# Altium PCB PCB1.PcbDoc (part 1 of 2)
Units mm, origin at the board's own origin, x right, y up, seen from the top; angles counter-clockwise.
Board outline 54.2 x 60.2 mm, 4 copper layers (Top Layer, Layer 1, Layer 2, Bottom Layer), stack 1.57 mm thick; 81 components, 54 nets, 273 pads, 297 vias.
Unrouted connection lines stored in the file: 3.
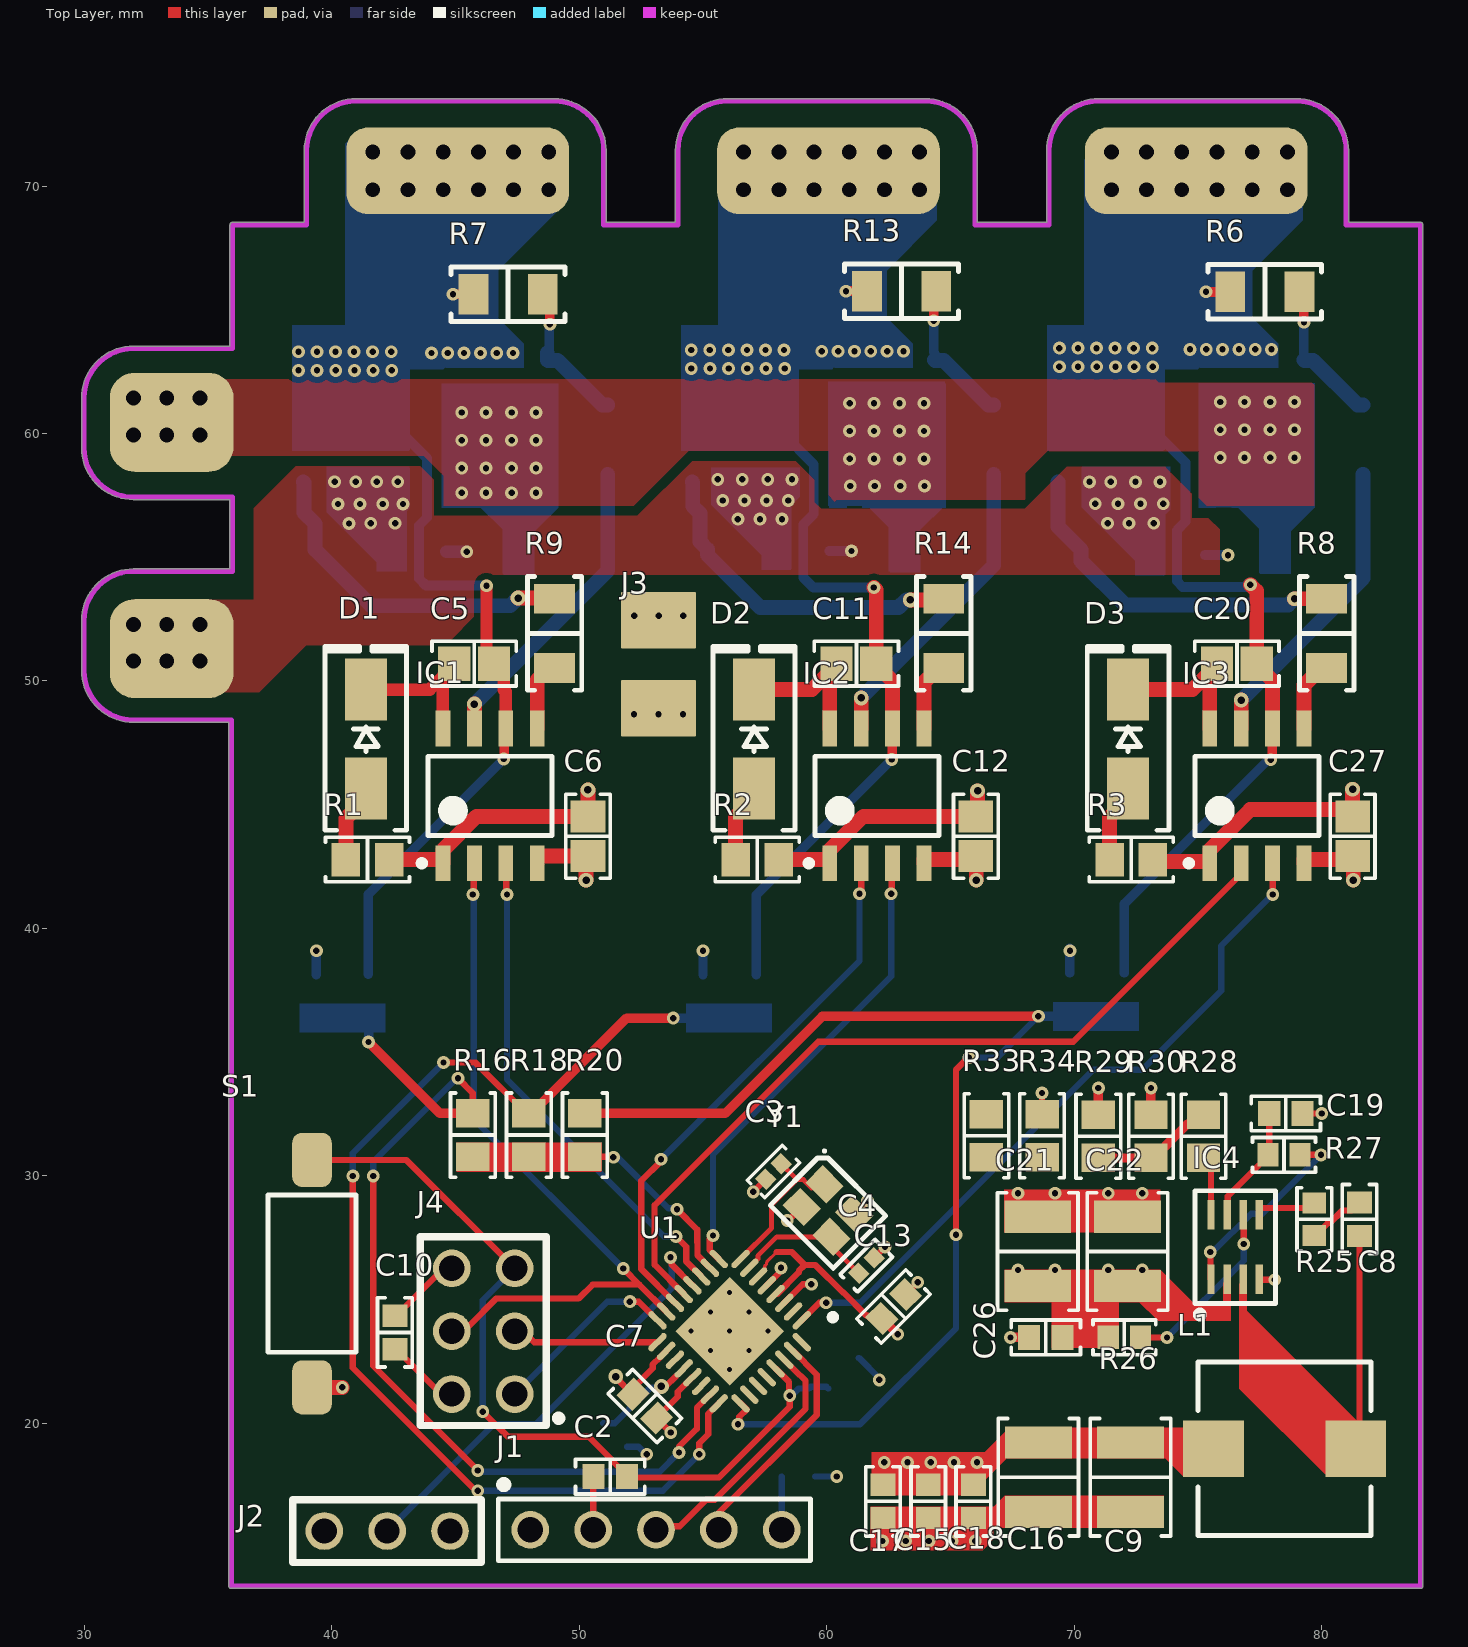
[diagram p0: Top Layer view]
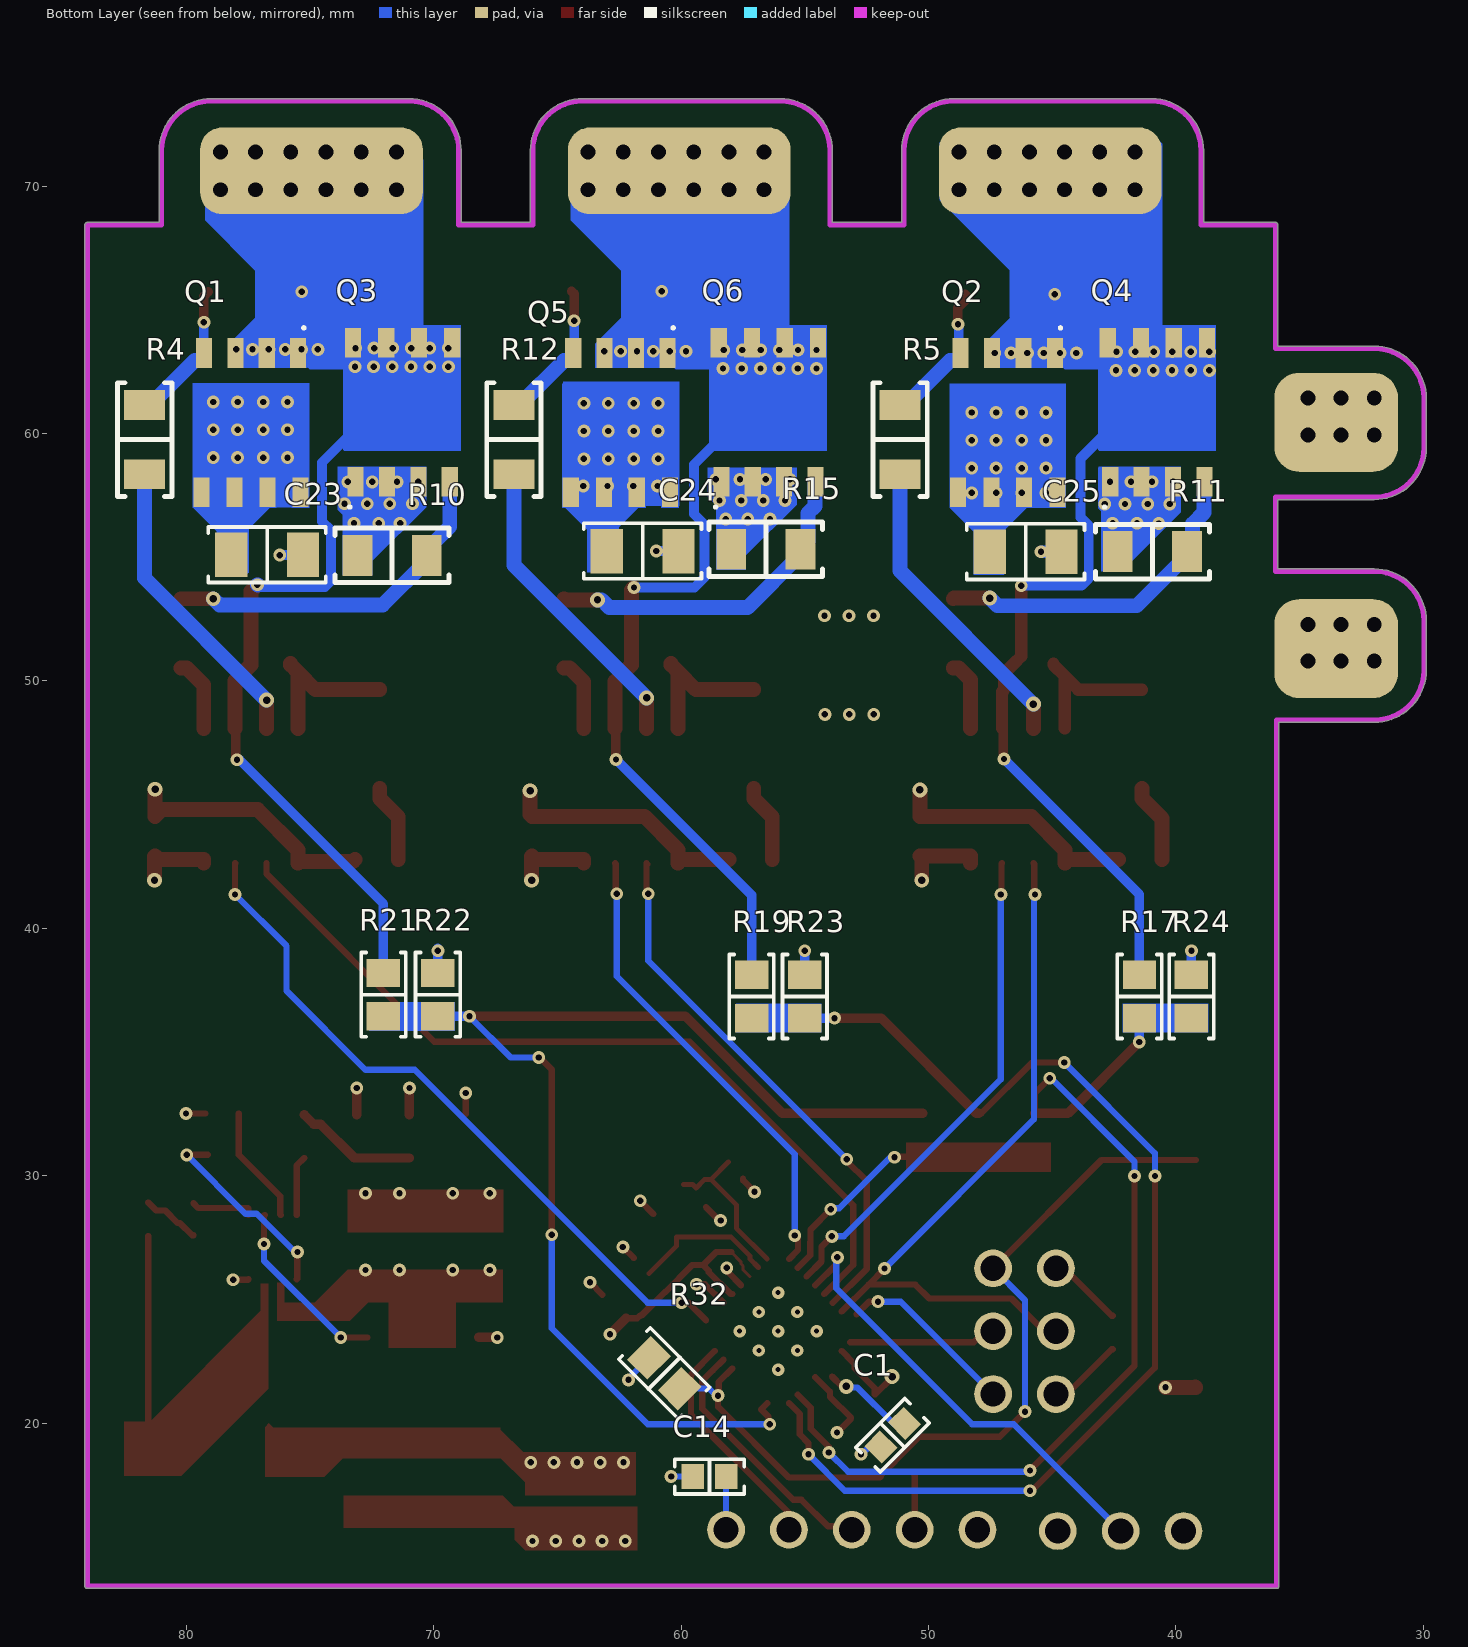
[diagram p1: Bottom Layer view, seen from below]
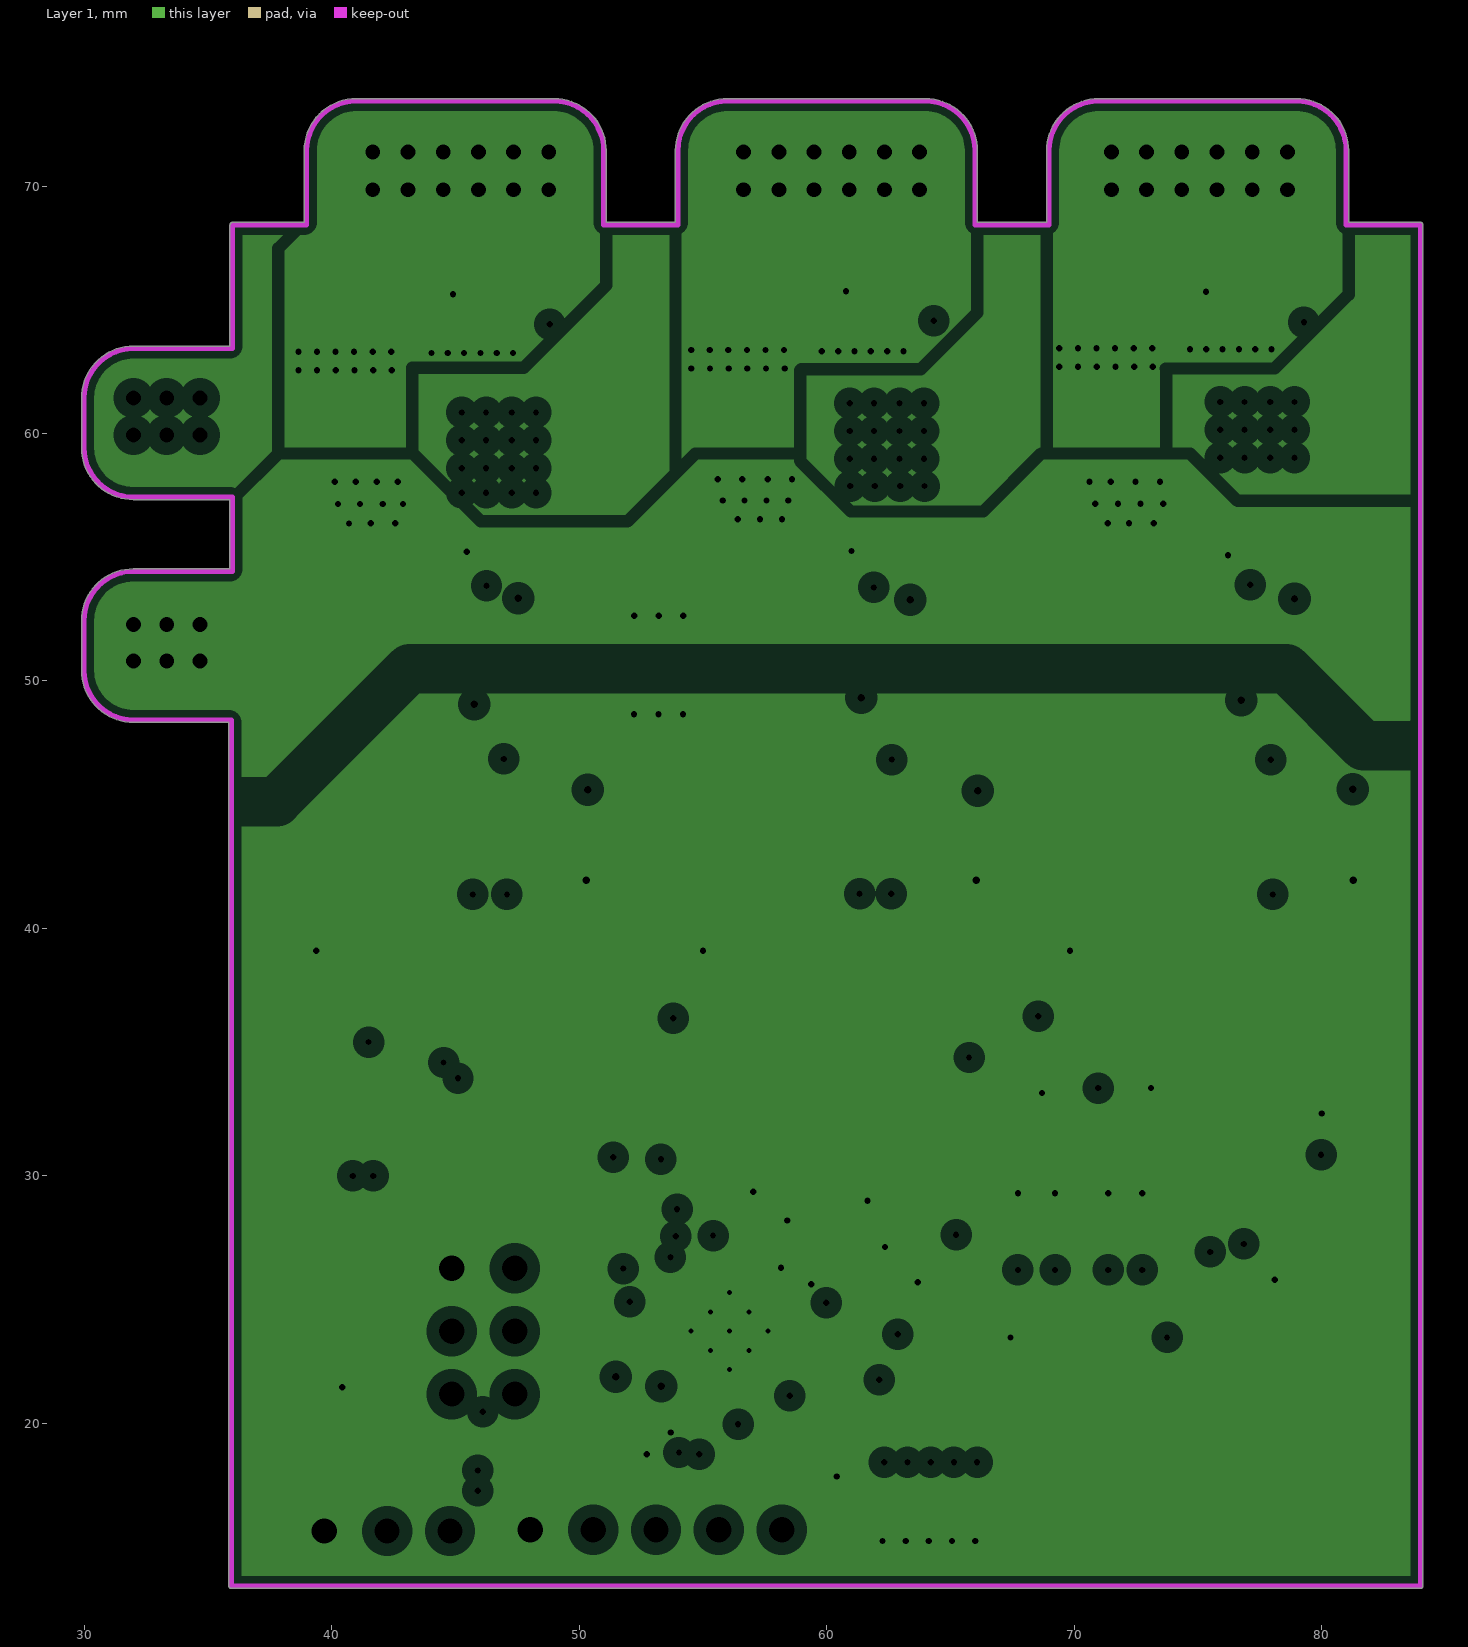
[diagram p2: Layer 1, clearances drawn from the general rule]
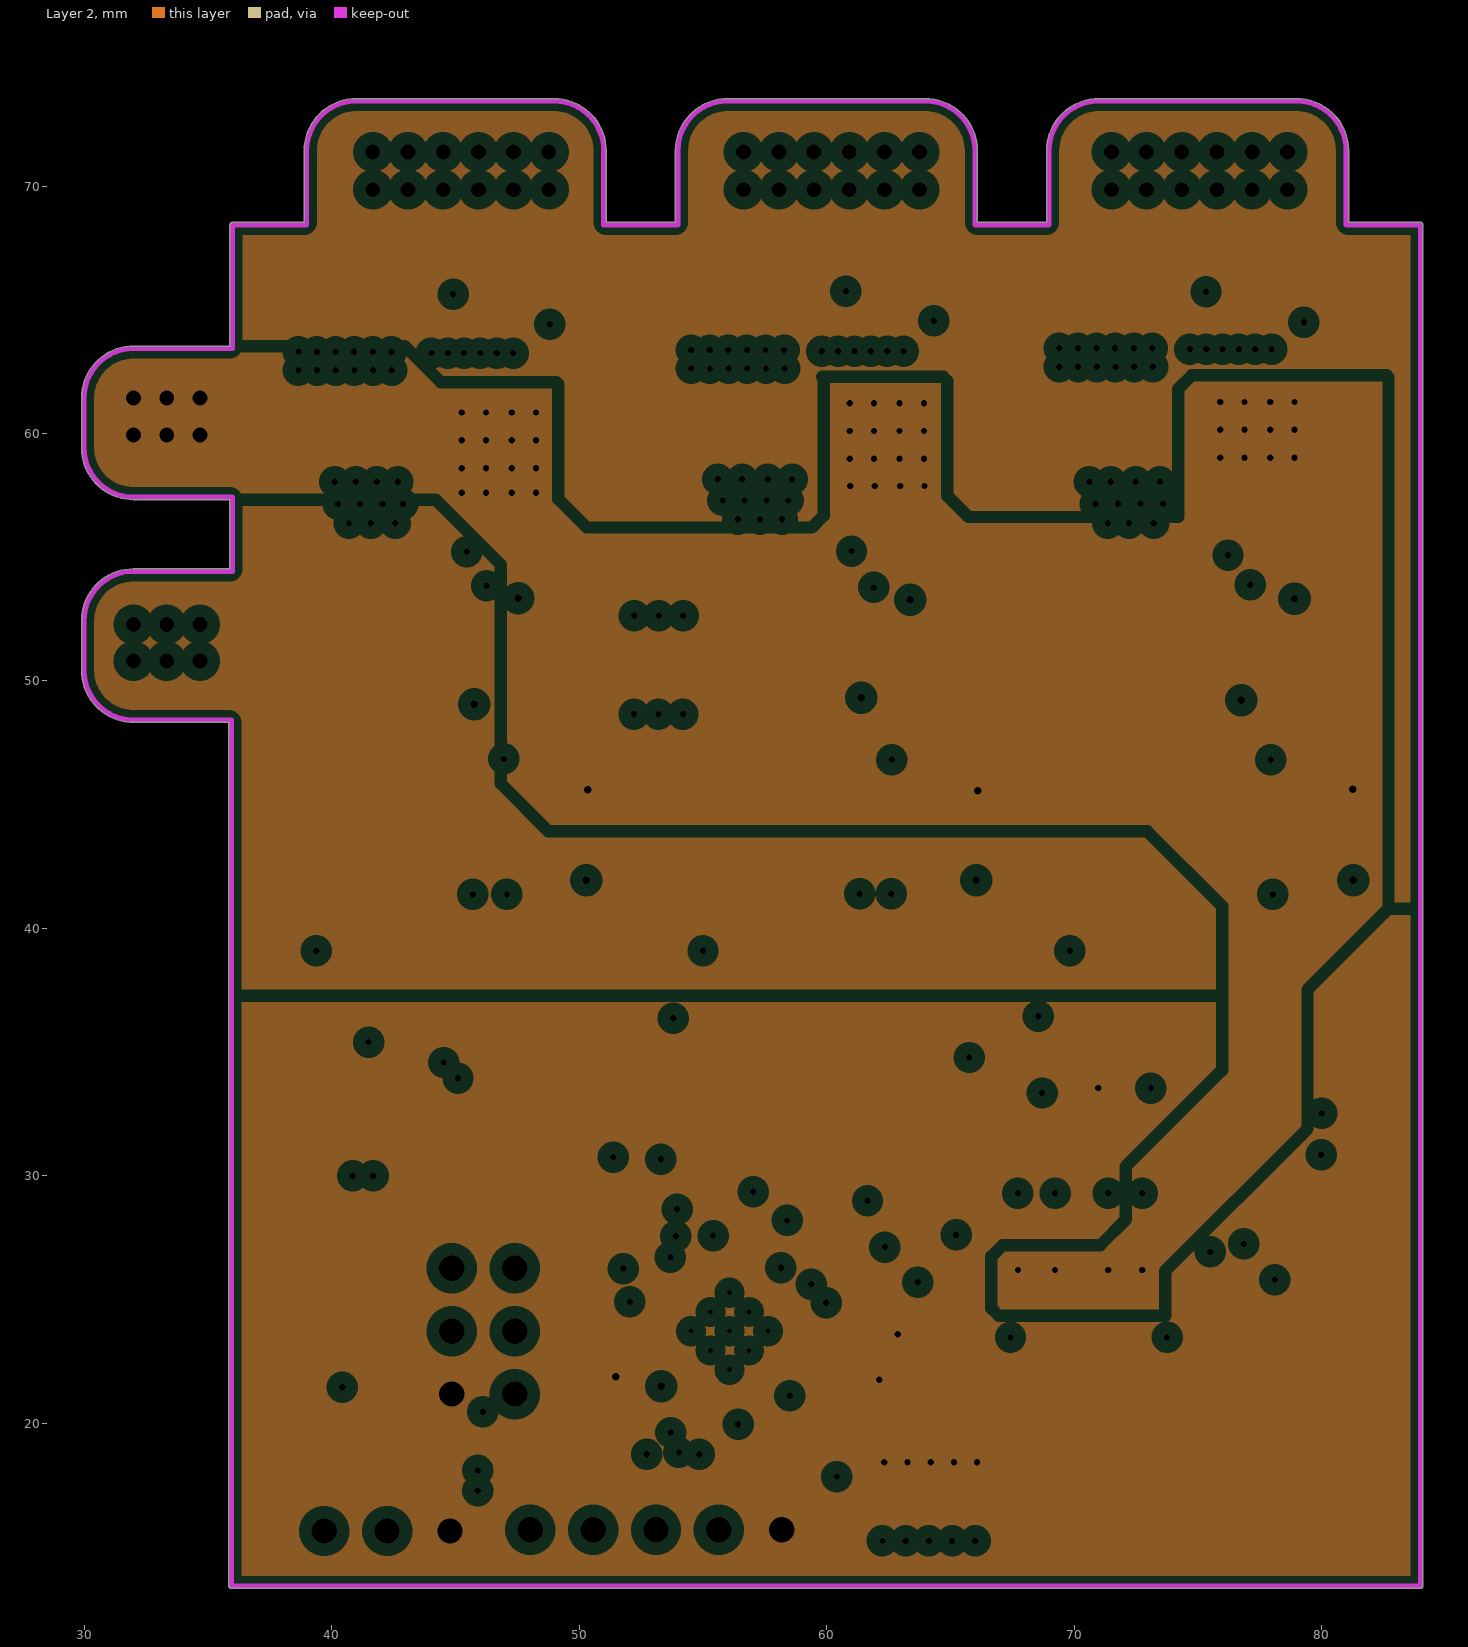
[diagram p3: Layer 2, clearances drawn from the general rule]
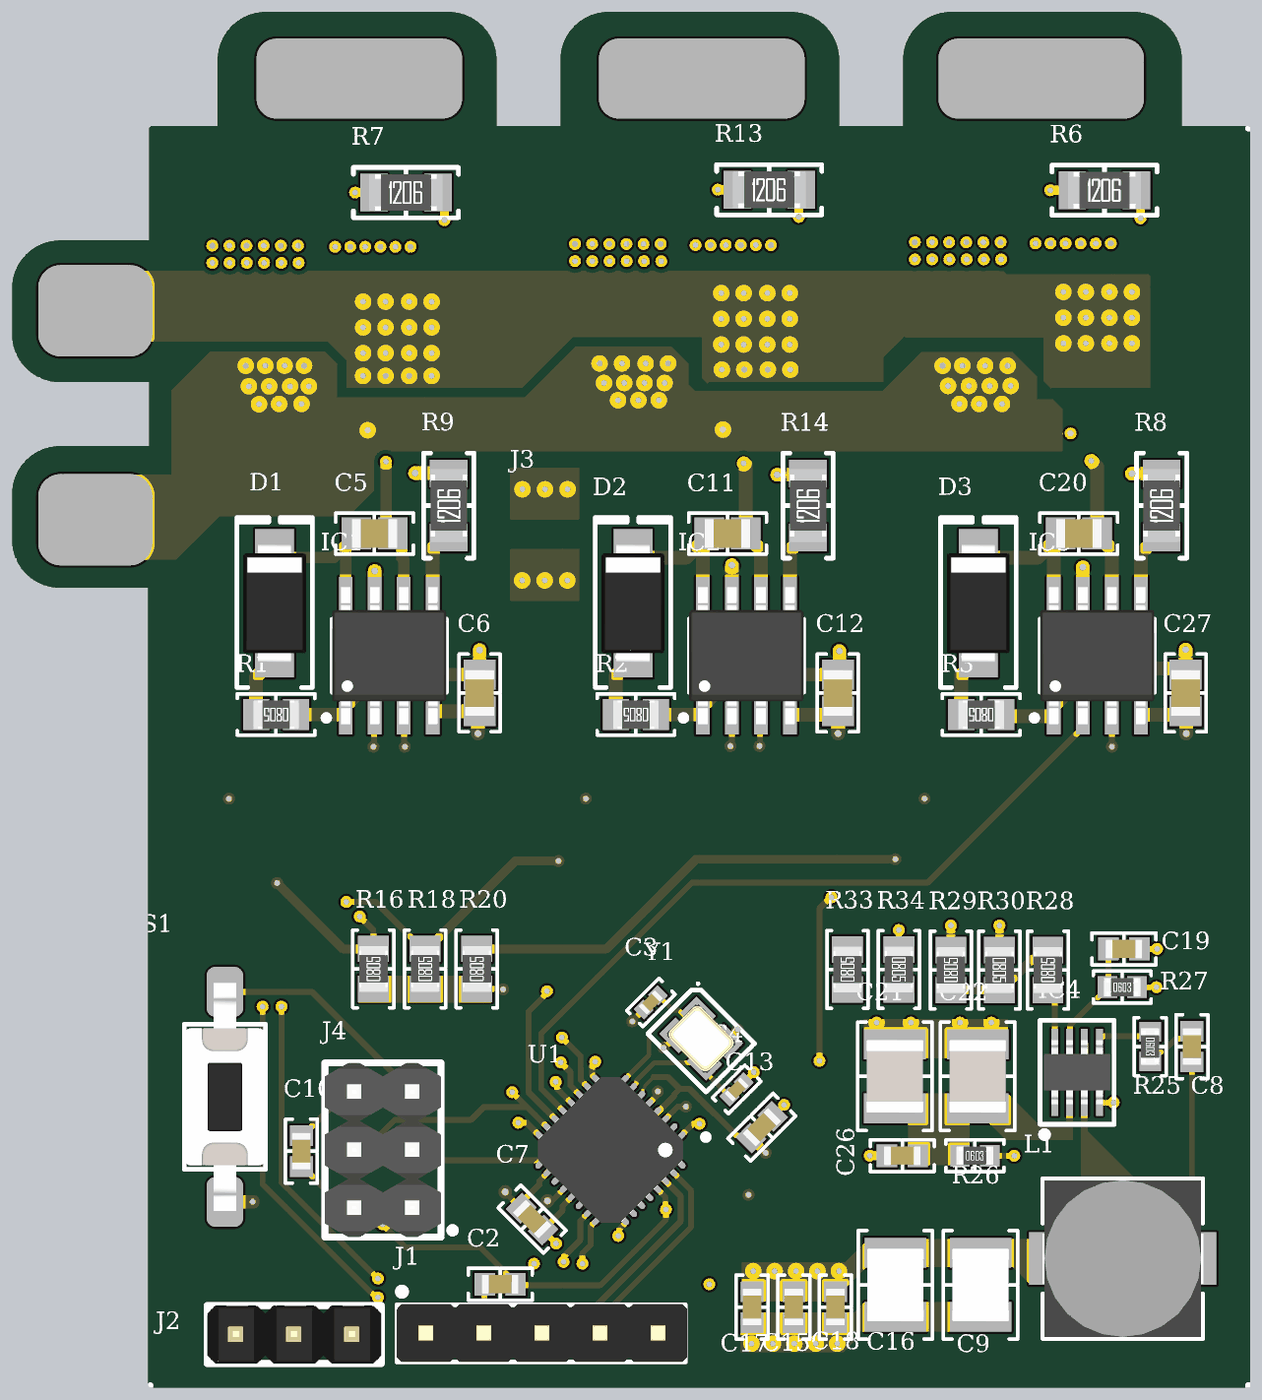
[diagram p5: 3D render of the assembled board from above, using the file's embedded part models]
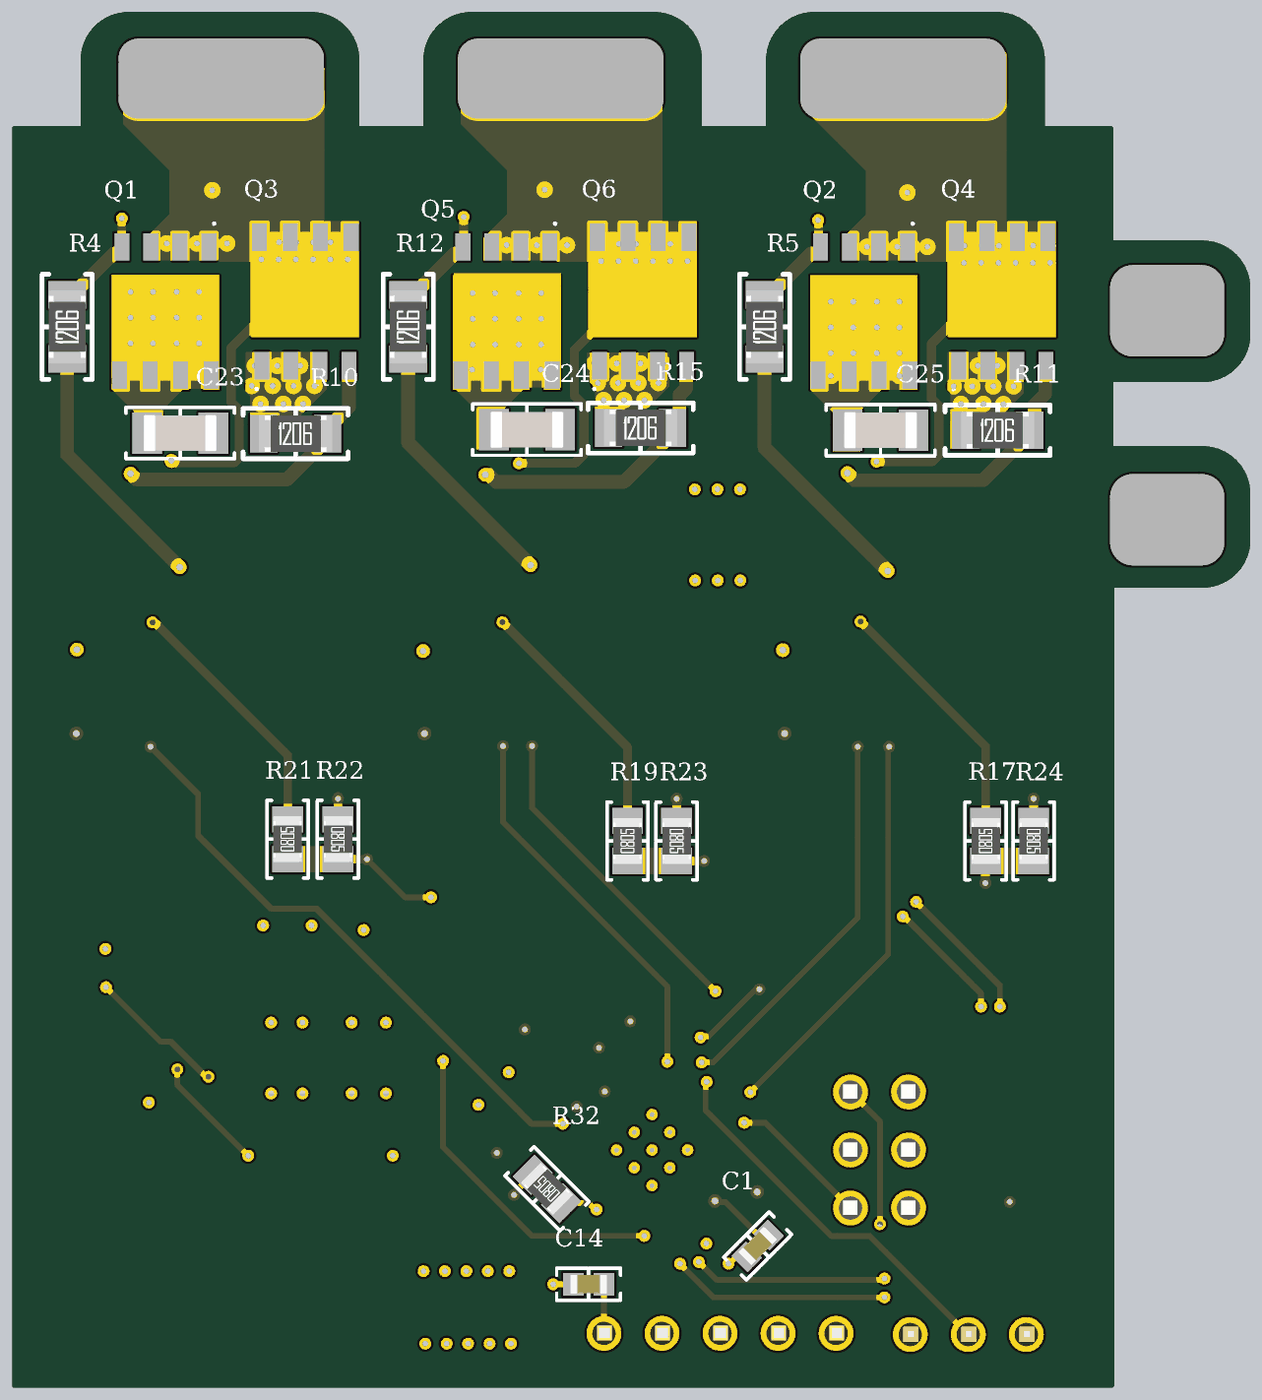
[diagram p6: 3D render of the assembled board from below, using the file's embedded part models]

## Layer stack, top to bottom
Top Solder: solder mask 0.0102, Solder Resist, Dk 3.5
Top Layer: signal copper 0.035
Dielectric 2: prepreg 0.2, PP-006, Dk 4.1
Layer 1: plane copper 0.0175, net (Multiple Nets)
Dielectric 1: dielectric 1.065, FR-4, Dk 4.8
Layer 2: plane copper 0.0175, net (Multiple Nets)
Dielectric 3: prepreg 0.2, PP-006, Dk 4.1
Bottom Layer: signal copper 0.035
Bottom Solder: solder mask 0.0102, Solder Resist, Dk 3.5

## Board outline
31.986,48.329 cw(c31.986,50.429) 29.886,50.429 29.886,52.429 cw(c31.986,52.429) 31.986,54.529 35.886,54.529 35.886,57.329 31.986,57.329 cw(c31.986,59.429) 29.886,59.429 29.886,61.429 cw(c31.986,61.429) 31.986,63.529 35.886,63.529 35.886,68.429 cw(c35.986,68.429) 35.986,68.529 38.886,68.529 38.886,71.429 cw(c40.986,71.429) 40.986,73.529 48.986,73.529 cw(c48.986,71.429) 51.086,71.429 51.086,68.529 53.886,68.529 53.886,71.429 cw(c55.986,71.429) 55.986,73.529 63.986,73.529 cw(c63.986,71.429) 66.086,71.429 66.086,68.529 68.886,68.529 68.886,71.429 cw(c70.986,71.429) 70.986,73.529 78.986,73.529 cw(c78.986,71.429) 81.086,71.429 81.086,68.529 83.986,68.529 cw(c83.986,68.429) 84.086,68.429 84.086,13.429 cw(c83.986,13.429) 83.986,13.329 35.942,13.329 cw(c35.941,13.429) 35.841,13.429 35.841,48.329

## Design rules (kind name [scope] priority, off if disabled: settings)
Clearance [All] p1: gap=0.254 ignorepadtopadclearanceinfootprint=FALSE except(0: Arc-Hole Track-Hole SMDPad-Hole THPad-Hole Via-Hole Fill-Hole Poly-Hole Region-Hole Text-Hole; 0.127: SMDPad-SMDPad; 0.2: Arc-Arc Arc-Track Arc-SMDPad Track-Track Track-SMDPad; 0.33: Arc-THPad Track-THPad; 0.5: THPad-THPad)
MinimumAnnularRing [All] p1: minimumring=0.13
PlaneClearance [All] p1: clearance=0.508
PlaneConnect [All] p1: planeconnectstyle=Direct reliefexpansion=0.508 reliefentries=4 reliefconductorwidth=0.254 reliefairgap=0.254
PolygonConnect [All] p1: connectstyle=Direct reliefconductorwidth=0.254 reliefentries=4 polygonreliefangle="90 Angle" airgapwidth=0.254
RoutingVias [All] p1: holewidth=0.711 width=1.27 viastyle="Through Hole" minholewidth=0.2 minwidth=0.4 maxholewidth=0.711 maxwidth=1.27
SolderMaskExpansion [All] p1: expansion=0.102 istentingtop=FALSE
Width [InNetClass('Crystal Pinsw')] p1: maxlimit=1 minlimit=0.127 preferedwidth=0.254 minimp=50.000000 maximp=50.000000 favimp=50.000000
28 further rules are at their usual default settings.

## Classes and differential pairs
net class "SPI Pins": HIN1 MISO SCK
net class "Programming Pins": DTR RXD TXD
net class "Crystal Pinsw": OSC_IN OSC_OUT
component class U_BEMF_Sense: R16 R17 R18 R19 R20 R21 R22 R23 R24
component class U_MosfetDriver: C5 C6 C11 C12 C20 C27 D1 D2 D3 IC1 IC2 IC3 R1 R2 R3
component class U_Microcontroller: C1 C2 C3 C4 C7 C10 C13 C14 C15 C17 J1 J2 J4 R32 R33 R34 S1 U1 Y1
component class U_HalfBridge_MOSFET: C23 C24 C25 Q1 Q2 Q3 Q4 Q5 Q6 R4 R5 R6 R7 R8 R9 R10 R11 R12 R13 R14 R15
component class U_Power: C8 C9 C16 C18 C19 C21 C22 C26 IC4 J3 L1 R25 R26 R27 R28 R29 R30

## Components (designator, comment, footprint, x,y, rotation, side; value= is the part's Value field where it differs from the comment)
C1 "0.1µF" "CAP 0603_1608" 51.45,19.525 r315 bottom
C2 "0.1µF" "CAP 0603_1608" 51.25,17.85 r180 top
C3 "12pF" "CAP 0402_1005" 57.846,30.182 r45 top
C4 "12pF" "CAP 0402_1005" 61.6,26.375 r225 top
C5 "0.1µF" "CAP 0805_2012" 45.75,50.7 r180 top
C6 "0.1µF" "CAP 0805_2012" 50.35,43.727 r90 top
C7 "0.1µF" "CAP 0603_1608" 52.65,20.7 r135 top
C8 "0.1µF" "CAP 0603_1608" 81.525,28.25 r270 top
C9 "22µF" "CAP 1210_3225 - 1MM" 72.274,17.825 r90 top
C10 "0.1µF" "CAP 0603_1608" 42.55,23.675 r270 top
C11 "0.1µF" "CAP 0805_2012" 61.2,50.7 r180 top
C12 "0.1µF" "CAP 0805_2012" 66.025,43.727 r90 top
C13 "0.1µF" "CAP 0603_1608" 62.7,24.725 r225 top
C14 "0.1µF" "CAP 0603_1608" 58.85,17.85 r180 bottom
C15 "0.1µF" "CAP 0603_1608" 64.1,16.85 r90 top
C16 "22µF" "CAP 1210_3225 - 1MM" 68.55,17.825 r90 top
C17 "0.1µF" "CAP 0603_1608" 62.275,16.85 r270 top
C18 "0.1µF" "CAP 0603_1608" 65.925,16.85 r90 top
C19 "0.1µF" "CAP 0603_1608" 78.55,32.525 r180 top
C20 "0.1µF" "CAP 0805_2012" 76.575,50.7 r180 top
C21 "10µF" "CAP 1210_3225 - 1.8MM" 68.525,26.95 r270 top
C22 "10µF" "CAP 1210_3225 - 1.8MM" 72.15,26.95 r270 top
C23 "1µF" "CAP 1206_3216 - 1.8MM" 76.725,55.1 r0 bottom
C24 "1µF" "CAP 1206_3216 - 1.8MM" 61.55,55.25 r0 bottom
C25 "1µF" "CAP 1206_3216 - 1.8MM" 46.075,55.225 r0 bottom
C26 "0.1µF" "CAP 0603_1608" 68.85,23.475 r0 top
C27 "0.1µF" "CAP 0805_2012" 81.25,43.727 r90 top
D1 "US1K-TP" "DO214AC SMA" 41.375,47.65 r90 top
D2 "US1K-TP" "DO214AC SMA" 57.063,47.65 r90 top
D3 "US1K-TP" "DO214AC SMA" 72.176,47.65 r90 top
IC1 "IR2101" SOIC8 46.395,45.359 r90 top
IC2 "IR2101" SOIC8 62.028,45.359 r90 top
IC3 "IR2101" SOIC8 77.383,45.359 r90 top
IC4 "MP4420H" TSOT23-8 76.5,28.425 r0 top
J1 "1x5 Header" 1X5-HEADER 53.1,15.7 r0 top
J2 "1x3 Header" 1x3Header 39.695,15.65 r0 top
J3 "2 way net tie junction" 2way_HP 53.2,50.675 r90 top net-tie
J4 "2x3 Header" "3x2 Header" 47.39,21.185 r90 top
L1 "TPY0705-100M" INDP6868X46N 78.5,18.975 r180 top
Q1 "BSC050N03LS G" INF-PG-TDSON-8-1_V 77.375,60.425 r0 bottom
Q2 "BSC050N03LS G" INF-PG-TDSON-8-1_V 46.8,60.425 r0 bottom
Q3 "BSC050N03LS G" INF-PG-TDSON-8-1_V 71.25,60.871 r180 bottom
Q4 "BSC050N03LS G" INF-PG-TDSON-8-1_V 40.75,60.871 r180 bottom
Q5 "BSC050N03LS G" INF-PG-TDSON-8-1_V 62.45,60.425 r0 bottom
Q6 "BSC050N03LS G" INF-PG-TDSON-8-1_V 56.467,60.871 r180 bottom
R1 "10 Ohms" "RES 0805_2012" 41.442,42.782 r180 top
R2 "10 Ohms" "RES 0805_2012" 57.19,42.782 r180 top
R3 "10 Ohms" "RES 0805_2012" 72.303,42.782 r180 top
R4 "47 Ohms" "RES 1206_3216" 81.675,59.75 r90 bottom
R5 "47 Ohms" "RES 1206_3216" 51.15,59.75 r90 bottom
R6 "470 kOhms" "RES 1206_3216" 77.7,65.725 r0 top
R7 "470 kOhms" "RES 1206_3216" 47.125,65.625 r0 top
R8 "47 Ohms" "RES 1206_3216" 80.2,51.925 r90 top
R9 "47 Ohms" "RES 1206_3216" 49,51.925 r90 top
R10 "470 kOhms" "RES 1206_3216" 71.675,55.075 r180 bottom
R11 "470 kOhms" "RES 1206_3216" 40.951,55.225 r180 bottom
R12 "47 Ohms" "RES 1206_3216" 66.75,59.75 r90 bottom
R13 "470 kOhms" "RES 1206_3216" 63.025,65.75 r0 top
R14 "47 Ohms" "RES 1206_3216" 64.725,51.925 r90 top
R15 "470 kOhms" "RES 1206_3216" 56.575,55.325 r180 bottom
R16 "33 kOhms" "RES 0805_2012" 45.7,31.65 r90 top
R17 "33 kOhms" "RES 0805_2012" 41.475,37.25 r90 bottom
R18 "33 kOhms" "RES 0805_2012" 47.962,31.65 r90 top
R19 "33 kOhms" "RES 0805_2012" 57.15,37.25 r90 bottom
R20 "33 kOhms" "RES 0805_2012" 50.225,31.65 r90 top
R21 "33 kOhms" "RES 0805_2012" 72.025,37.325 r90 bottom
R22 "10 kOhms" "RES 0805_2012" 69.825,37.325 r270 bottom
R23 "10 kOhms" "RES 0805_2012" 55,37.25 r270 bottom
R24 "10 kOhms" "RES 0805_2012" 39.375,37.25 r270 bottom
R25 "20 Ohms" "RES 0603_1608" 79.7,28.25 r270 top
R26 "1 MOhms" "RES 0603_1608" 72.025,23.475 r0 top
R27 "100 kOhms" "RES 0603_1608" 78.475,30.85 r0 top
R28 "51 kOhms" "RES 0805_2012" 75.225,31.6 r90 top
R29 "41.2 kOhms" "RES 0805_2012" 70.975,31.6 r90 top
R30 "7.68 kOhms" "RES 0805_2012" 73.1,31.6 r270 top
R32 "10 kOhms" "RES 0805_2012" 60.675,22.025 r45 bottom
R33 "33 kOhms" "RES 0805_2012" 66.45,31.625 r90 top
R34 "10 kOhms" "RES 0805_2012" 68.7,31.625 r270 top
S1 "FSMSM" "TE FSMSMTR" 39.2,26.05 r0 top
U1 "ATMEGA328P-MU" QFN50P500X500X100_HS-33N 56.075,23.725 r225 top
Y1 "16MHz" "NDK NX2520SA" 60.05,28.6 r315 top

## Footprints (in the part's own frame and the unit in brackets; to place one, negate y for a bottom-side part, rotate by r counter-clockwise, add the part's x,y. Pads: shape width x height; smd on the part's side, far side on the other; paste and mask are expansions set on the pad)
1x3Header [mil]
  round 60 hole 40.16: 1(0,0) 2(100,0) 3(200,0)
  silkscreen extent -50,-50 250,50, body extent -50,-50 250,50, height 366
1X5-HEADER [mil]
  round 60 hole 40.16: 1(-200,0) 2(-100,0) 3(0,0) 4(100,0) 5(200,0)
  silkscreen extent -251,-49 246,76, body extent -251,-49 249,51, height 344
2way_HP [mil] "2 way high power power net tie junction"
  rrect5% 90x120 smd paste-100 mask+4: 1(-70,0) 2(70,0)
"3x2 Header" [mil]
  round 60 hole 40.16: 1(0,0) 2(0,100) 3(100,0) 4(100,100) 5(200,0) 6(200,100)
  silkscreen extent -50,-73 250,150, body extent -50,-50 250,150, height 334
"CAP 0402_1005" [mm] "Chip Capacitor, 2-Leads, Body 1.02x0.51mm, IPC Medium Density"
  rect 0.6x0.64 smd: 1(-0.44,0) 2(0.44,0)
  silkscreen extent -1,-0.5 1,0.5, body extent -0.5,-0.26 0.5,0.26, height 0.52
"CAP 0603_1608" [mm] "Chip Capacitor, 2-Leads, Body 1.60x0.80mm, IPC Medium Density"
  rect 0.9x1 smd: 1(-0.675,0) 2(0.675,0)
  silkscreen extent -1.4,-0.7 1.4,0.7, body extent -0.8,-0.41 0.8,0.41, height 0.82
"CAP 0805_2012" [mm] "Chip Capacitor, 2-Leads, Body 2.00x1.20mm, IPC Medium Density"
  rect 1.3x1.4 smd: 1(-0.8,0) 2(0.8,0)
  silkscreen extent -1.7,-0.9 1.7,0.9, body extent -1,-0.64 1,0.64, height 1.26
"CAP 1206_3216 - 1.8MM" [mm] "Chip Capacitor, 2-Leads, Body 3.25x1.60mm, IPC Medium Density"
  rect 1.3x1.8 smd: 1(-1.45,0) 2(1.45,0)
  silkscreen extent -2.37,-1.12 2.37,1.12, body extent -1.6,-0.8 1.6,0.8, height 1.8
"CAP 1210_3225 - 1.8MM" [mm] "Chip Capacitor, 2-Leads, Body 3.20x2.50mm, IPC Medium Density"
  rect 1.3x2.7 smd: 1(-1.4,0) 2(1.4,0)
  silkscreen extent -2.37,-1.63 2.37,1.63, body extent -1.6,-1.25 1.6,1.25, height 1.8
"CAP 1210_3225 - 1MM" [mm] "Chip Capacitor, 2-Leads, Body 3.20x2.50mm, IPC Medium Density"
  rect 1.3x2.7 smd: 1(-1.4,0) 2(1.4,0)
  silkscreen extent -2.37,-1.63 2.37,1.63, body extent -1.6,-1.25 1.6,1.25, height 1
"DO214AC SMA" [mm] "Molded Diode, 2-Leads, Body 4.30x2.60mm, IPC Medium Density"
  rect 2.5x1.7 smd: 1(-2,0) 2(2,0)
  silkscreen extent -3.68,-1.65 3.75,1.65, body extent -2.6,-1.37 2.6,1.37, height 2.4
INDP6868X46N [mm] "Precision Wire Wound Inductor, 2-Leads, Body 6,85x6,85mm, IPC Medium Density"
  rect 2.45x2.3 smd: 1(-2.875,0) 2(2.875,0)
  silkscreen extent -3.5,-3.5 3.5,3.5, body extent -3.52,-3.42 3.52,3.42, height 4.7
INF-PG-TDSON-8-1_V [mm] "TDSON, 8-Leads, Body 6.15x5.15mm, Pitch 1.27mm"
  rect 0.65x1.2 smd: 1(-1.905,-2.825) 2(-0.635,-2.825) 3(0.635,-2.825) 4(1.905,-2.825) 5(2.007,2.794) 6(0.66,2.794) 7(-0.66,2.794) 8(-2.007,2.794)
  Top Layer region: 0.315,2.925 1.015,2.925 1.015,3.425 0.315,3.425
  Top Layer region: -1.015,2.925 -0.315,2.925 -0.315,3.425 -1.015,3.425
  Top Layer region: 1.65,2.925 2.35,2.925 2.35,3.425 1.65,3.425
  Top Layer region: -2.35,2.925 -1.65,2.925 -1.65,3.425 -2.35,3.425
  Top Layer region: -2.35,2.925 -2.35,-1.575 2.35,-1.575 2.35,2.925
  silkscreen extent -2.23,-3.94 -2.03,-3.74, body extent -2.58,-3.08 2.58,3.08, height 1
"NDK NX2520SA" [mm] "Crystal, 4-Leads, Body 2.00x2.50mm, Pitch 1.70mm, IPC Medium Density"
  rect 1.2x1 smd: 1(-0.85,0.65) 2(-0.85,-0.65) 3(0.85,-0.65) 4(0.85,0.65)
  silkscreen extent -1.85,-1.5 1.8,1.65, body extent -1.26,-1.01 1.26,1.01, height 0.5
QFN50P500X500X100_HS-33N [mm] "QFN, 32-Leads, Body 5,00x5,00mm, Pitch 0,50mm, Thermal Pad 3,10x3,10mm, IPC Medium Density"
  oval 0.95x0.25 smd: 1(-2.375,1.75) 2(-2.375,1.25) 3(-2.375,0.75) 4(-2.375,0.25) 5(-2.375,-0.25) 6(-2.375,-0.75) 7(-2.375,-1.25) 8(-2.375,-1.75) 17(2.375,-1.75) 18(2.375,-1.25) 19(2.375,-0.75) 20(2.375,-0.25) 21(2.375,0.25) 22(2.375,0.75) 23(2.375,1.25) 24(2.375,1.75)
  oval 0.25x0.95 smd: 9(-1.75,-2.375) 10(-1.25,-2.375) 11(-0.75,-2.375) 12(-0.25,-2.375) 13(0.25,-2.375) 14(0.75,-2.375) 15(1.25,-2.375) 16(1.75,-2.375) 25(1.75,2.375) 26(1.25,2.375) 27(0.75,2.375) 28(0.25,2.375) 29(-0.25,2.375) 30(-0.75,2.375) 31(-1.25,2.375) 32(-1.75,2.375)
  rect 3.1x3.1 smd: 33(0,0)
  silkscreen extent -3.47,2.43 -3.23,2.67, body extent -2.57,-2.57 2.57,2.57, height 1
"RES 0603_1608" [mm] "Chip Resistor, 2-Leads, Body 1.60x0.80mm, IPC Medium Density"
  rect 0.85x0.95 smd: 1(-0.65,0) 2(0.65,0)
  silkscreen extent -1.27,-0.7 1.27,0.7, body extent -0.8,-0.4 0.8,0.4, height 0.45
"RES 0805_2012" [mm] "Chip Resistor, 2-Leads, Body 2.00x1.25mm, IPC Medium Density"
  rect 1.15x1.35 smd: 1(-0.875,0) 2(0.875,0)
  silkscreen extent -1.7,-0.9 1.7,0.9, body extent -1,-0.62 1,0.63, height 0.6
"RES 1206_3216" [mm] "Chip Resistor, 2-Leads, Body 3.13x1.55mm, IPC Medium Density"
  rect 1.2x1.65 smd: 1(-1.4,0) 2(1.4,0)
  silkscreen extent -2.3,-1.1 2.3,1.1, body extent -1.6,-0.8 1.6,0.8, height 0.6
SOIC8 [mm] "SOIC, 8-Leads, Body 4,90x3,90mm, Pitch 1,27mm, IPC Medium Density"
  rect 1.45x0.6 smd: 1(-2.725,1.905) 2(-2.725,0.635) 3(-2.725,-0.635) 4(-2.725,-1.905) 5(2.725,-1.905) 6(2.725,-0.635) 7(2.725,0.635) 8(2.725,1.905)
  silkscreen extent -2.85,-2.5 1.6,2.88, body extent -3,-2.5 3,2.5, height 1.75
"TE FSMSMTR" [mm]
  rrect50% 1.6x2.19 smd: 1(0,4.595) 2(0,-4.595)
  silkscreen extent -1.78,-3.17 1.78,3.17, body extent -1.75,-4.98 1.75,4.98, height 4.42
TSOT23-8 [mm]
  rect 0.3x1.2 smd: 1(-0.975,-2.6) 2(-0.325,-2.6) 3(0.325,-2.6) 4(0.975,-2.6) 5(0.975,0) 6(0.325,0) 7(-0.325,0) 8(-0.975,0)
  silkscreen extent -1.63,-4.1 1.63,0.97, body extent -1.45,-2.7 1.45,0.1, height 1

## Part data
C1 C2 C7 C8 C10 C13 C14 C15 C17 C18 C19 C26: library part CML0603X7R104KT50V, "CAP CER 0.1UF 50V X7R 0603", Device Package="0603 (1608 Metric)", Manufacturer="Stackpole Electronics Inc", Operating Temperature="-55°C ~ 125°C", Supplier Part Number 1=738-CML0603X7R104KT50VCT-ND, Temperature Coefficient=X7R, Tolerance=±10%, Voltage - Rated=50V, Applications="General Purpose", Capacitance=0.1µF, ComponentLink1Description=Datasheet, ComponentLink1URL=http://www.seielect.com/Catalog/SEI-CML.PDF, ComponentLink2Description="DigiKey Link", ComponentLink2URL=http://digikey.com/product-detail/en/stackpole-electronics-inc/CML0603X7R104KT50V/738-CML0603X7R104KT50VCT-ND/10660220, LastUpdated="2.9.2020 01:03:28", Lifecycle Status=Active, Minimum Order=1, Mounting Type="Surface Mount, MLCC", Package / Case="0603 (1608 Metric)", Packaging=Unknown, Part Number=CML0603X7R104KT50V, Part Status=Active, PartId=26324, Price=0.01, Series=CML_X7R, Supplier 1=DigiKey
C3 C4: library part 04025U120GAT2A, "CAP CER 12PF 50V NP0 0402", Device Package="0402 (1005 Metric)", Manufacturer="AVX Corporation", Operating Temperature="-55°C ~ 125°C", Supplier Part Number 1=478-10137-1-ND, Temperature Coefficient="C0G, NP0", Tolerance=±2%, Voltage - Rated=50V, Applications="RF, Microwave, High Frequency", Capacitance=12pF, ComponentLink1Description=Datasheet, ComponentLink1URL=http://datasheets.avx.com/U-Series.pdf, ComponentLink2Description="DigiKey Link", ComponentLink2URL=http://digikey.com/product-detail/en/avx-corporation/04025U120GAT2A/478-10137-1-ND/6797158, Features="Ultra Low ESR", LastUpdated="2.9.2020 01:01:29", Lifecycle Status=Active, Minimum Order=1, Mounting Type="Surface Mount, MLCC", Package / Case="0402 (1005 Metric)", Packaging=TapeAndReel, Part Number=04025U120GAT2A, Part Status=Active, PartId=12930, Price=0.05, Series=U, Size / Dimension="0.039\" L x 0.020\" W (1.00mm x 0.50mm)", Supplier 1=DigiKey, Thickness (Max)="0.022\" (0.55mm)"
C5 C6 C11 C12 C20 C27: library part CML0805X7R104KT50V, "CAP CER 0.1UF 50V X7R 0805", Device Package="0805 (2012 Metric)", Manufacturer="Stackpole Electronics Inc", Operating Temperature="-55°C ~ 125°C", Supplier Part Number 1=738-CML0805X7R104KT50VCT-ND, Temperature Coefficient=X7R, Tolerance=±10%, Voltage - Rated=50V, Applications="General Purpose", Capacitance=0.1µF, ComponentLink1Description=Datasheet, ComponentLink1URL=http://www.seielect.com/Catalog/SEI-CML.PDF, ComponentLink2Description="DigiKey Link", ComponentLink2URL=http://digikey.com/product-detail/en/stackpole-electronics-inc/CML0805X7R104KT50V/738-CML0805X7R104KT50VCT-ND/10660126, LastUpdated="2.9.2020 01:04:17", Lifecycle Status=Active, Minimum Order=1, Mounting Type="Surface Mount, MLCC", Package / Case="0805 (2012 Metric)", Packaging=Unknown, Part Number=CML0805X7R104KT50V, Part Status=Active, PartId=26478, Price=0.02, Series=CML_X7R, Supplier 1=DigiKey
C9 C16: library part EMK325BJ226MD-T, "CAP CER 22UF 16V X5R 1210", Device Package="1210 (3225 Metric)", Manufacturer="Taiyo Yuden", Operating Temperature="-55°C ~ 85°C", Supplier Part Number 1=587-2412-1-ND, Temperature Coefficient=X5R, Tolerance=±20%, Voltage - Rated=16V, Applications="General Purpose", Capacitance=22µF, ComponentLink1Description=Datasheet, ComponentLink1URL="https://ds.yuden.co.jp/TYCOMPAS/ut/detail?pn=EMK325BJ226MD-T  &u=M", ComponentLink2Description="DigiKey Link", ComponentLink2URL=http://digikey.com/product-detail/en/taiyo-yuden/EMK325BJ226MD-T/587-2412-1-ND/2230278, LastUpdated="2.9.2020 01:10:27", Lifecycle Status=Active, Minimum Order=1, Mounting Type="Surface Mount, MLCC", Package / Case="1210 (3225 Metric)", Packaging=TapeAndReel, Part Number=EMK325BJ226MD-T, Part Status=Active, PartId=25269, Price=0.25, Series=M, Size / Dimension="0.126\" L x 0.098\" W (3.20mm x 2.50mm)", Supplier 1=DigiKey, Thickness (Max)="0.037\" (0.95mm)"
C21 C22: library part 1210BW106K500NGX110T, "CAP CER 10UF 50V X5R 1210", Device Package="1210 (3225 Metric)", Manufacturer="Knowles Novacap", Operating Temperature="-55°C ~ 85°C", Supplier Part Number 1=1763-1137-1-ND, Temperature Coefficient=X5R, Tolerance=±10%, Voltage - Rated=50V, Applications="General Purpose", Capacitance=10µF, ComponentLink1Description=Datasheet, ComponentLink1URL=https://www.knowlescapacitors.com/getattachment/6c8d48ef-fc2b-4752-ae2c-ce6c208de0c4/High-Capacitance-Chip.aspx, ComponentLink2Description="DigiKey Link", ComponentLink2URL=http://digikey.com/product-detail/en/knowles-novacap/1210BW106K500NGX110T/1763-1137-1-ND/7304036, Features="Gold Flash Termination", LastUpdated="2.9.2020 01:10:35", Lifecycle Status=Active, Minimum Order=1, Mounting Type="Surface Mount, MLCC", Package / Case="1210 (3225 Metric)", Packaging=TapeAndReel, Part Number=1210BW106K500NGX110T, Part Status=Active, PartId=24853, Price=5.15, Series=-, Size / Dimension="0.125\" L x 0.100\" W (3.18mm x 2.54mm)", Supplier 1=DigiKey, Thickness (Max)="0.065\" (1.65mm)"
C23 C24 C25: library part HMK316B7105KLHT, "CAP CER 1UF 100V X7R 1206", Device Package="1206 (3216 Metric)", Manufacturer="Taiyo Yuden", Operating Temperature="-55°C ~ 125°C", Ratings=AEC-Q200, Supplier Part Number 1=587-6325-1-ND, Temperature Coefficient=X7R, Tolerance=±10%, Voltage - Rated=100V, Applications=Automotive, Capacitance=1µF, ComponentLink1Description=Datasheet, ComponentLink1URL=https://www.yuden.co.jp/productdata/catalog/mlcc06_hq_e.pdf, ComponentLink2Description="DigiKey Link", ComponentLink2URL=http://digikey.com/product-detail/en/taiyo-yuden/HMK316B7105KLHT/587-6325-1-ND/9949911, Features="High Voltage", LastUpdated="2.9.2020 01:05:24", Lifecycle Status=Active, Minimum Order=1, Mounting Type="Surface Mount, MLCC", Package / Case="1206 (3216 Metric)", Packaging=TapeAndReel, Part Number=HMK316B7105KLHT, Part Status=Active, PartId=22611, Price=0.13, Series=M, Size / Dimension="0.126\" L x 0.063\" W (3.20mm x 1.60mm)", Supplier 1=DigiKey, Thickness (Max)="0.071\" (1.80mm)"
D1 D2 D3: "DIODE GEN PURP 800V 1A DO214AC", Capacitance @ Vr, F="10pF @ 4V, 1MHz", Current - Average Rectified (Io)=1A, Current - Reverse Leakage @ Vr="10µA @ 800V", Manufacturer="Micro Commercial Co", Operating Temperature - Junction="-65°C ~ 175°C", Package / Case="DO-214AC, SMA", Supplier Device Package="DO-214AC (SMA)", Supplier Part Number 1=US1K-TPMSCT-ND, Voltage - DC Reverse (Vr) (Max)=800V, Voltage - Forward (Vf) (Max) @ If="1.7V @ 1A", ComponentLink1Description=Datasheet, ComponentLink1URL=https://www.mccsemi.com/pdf/Products/US1A-US1M(DO-214AC).pdf, ComponentLink2Description="DigiKey Link", ComponentLink2URL=http://digikey.com/product-detail/en/micro-commercial-co/US1K-TP/US1K-TPMSCT-ND/1793442, Diode Type=Standard, LastUpdated="2.9.2020 01:19:02", Lifecycle Status=Active, Minimum Order=1, Mounting Type="Surface Mount", Packaging=TapeAndReel, Part Number=US1K-TP, Part Status=Active, PartId=887, Price=0.08, Reverse Recovery Time (trr)=75ns, Series=-, Speed="Fast Recovery =< 500ns, > 200mA (Io)", Supplier 1=DigiKey
IC1 IC2 IC3: "IC-2101 HIGH-LOW DRIVER SOP8 IR"
IC4: "V.REG.2A 3.8V-36V STEP-DOW TSOT-23-8"
J1: "1X5 Male Header 2.54mm"
J2: "1x3 Male Header 2.54mm"
J3: library part 2way, ComponentLink1Description=Source, ComponentLink1URL=http://www.edatools.cz/addons, FootprintNote="LP=12mil, MP=40mil, HP=120mil"
J4: "2x3 Male Header 2.54mm"
L1: "INDUCTOR FIXED 10UH 7X7MM SMD"
Q1 Q2 Q3 Q4 Q5 Q6: library part "BSC050N03LS G_1", "N-Channel OptiMOS 3 Power-MOSFET, 30 V VDS, 79 A ID, -55 to 150 degC, PG-TDSON-8-1, Reel, Green", Manufacturer=Infineon, ComponentLink1Description="Manufacturer URL", ComponentLink1URL=http://www.infineon.com/, ComponentLink2Description=Datasheet, ComponentLink2URL=http://www.infineon.com/dgdl/BSC050N03LS_rev1.6.pdf?folderId=db3a304412b407950112b408e8c90004&fileId=db3a304412b407950112b4276b953c2b, ComponentLink3Description="Package Specification", ComponentLink3URL=http://www.infineon.com/cms/packages/SMD_-_Surface_Mounted_Devices/P-PG-TDSON/P-PG-TDSON-08-01x_2x_3.html?__locale=en, DatasheetVersion="Rev. 1.6", Green=TRUE, Halogen-free=TRUE, Mounting Technology="Surface Mount", PackageDescription="8-Pin Plastic (Green) Thin Dual Small Outline Non-Leaded Package, 5.15 x 5.9 mm Body, 1.27 mm Pitch", PackageReference=PG-TDSON-8-1, Packing=Reel, PartNumber="BSC050N03LS G", Polarity=N, Ptot (max)="48Â W", QG="13Â nC", RDS (on) (max)="5Â mOhm", RDS (on) (max) (@4.5V)="7.5Â mOhm", Rth="2.6Â K/W", RthJA (max)="50Â K/W", RthJC (max)="2.6Â K/W", VDS (max)="30Â V", VGS(th) (max)="2.2Â V", VGS(th) (min)="1Â V", ID (max)="79Â A", IDpuls (max)="316Â A"
R1 R2 R3: library part RK73H2ATTD10R0F, "RES 10 OHM 1% 1/4W 0805", Device Package="0805 (2012 Metric)", Manufacturer="KOA Speer Electronics, Inc.", Operating Temperature="-55°C ~ 155°C", Power (Watts)="0.25W, 1/4W", Ratings=AEC-Q200, Supplier Device Package=0805, Supplier Part Number 1=2019-RK73H2ATTD10R0FCT-ND, Temperature Coefficient=±100ppm/°C, Tolerance=±1%, ComponentLink1Description=Datasheet, ComponentLink1URL=http://www.koaspeer.com/catimages/Products/RK73H/RK73H.pdf, ComponentLink2Description="DigiKey Link", ComponentLink2URL=http://digikey.com/product-detail/en/koa-speer-electronics-inc/RK73H2ATTD10R0F/2019-RK73H2ATTD10R0FCT-ND/10234529, Composition="Thick Film", Features="Automotive AEC-Q200, Moisture Resistant", Height - Seated (Max)="0.024\" (0.60mm)", LastUpdated="2.9.2020 01:15:00", Lifecycle Status=Active, Minimum Order=1, Number of Terminations=2, Package / Case="0805 (2012 Metric)", Packaging=CutTape, Part Number=RK73H2ATTD10R0F, Part Status=Active, PartId=38358, Price=0.10, Resistance="10 Ohms", Series=RK73H, Size / Dimension="0.079\" L x 0.049\" W (2.00mm x 1.25mm)", Supplier 1=DigiKey
R4 R5 R8 R9 R12 R14: library part CRCW120647R0JNEAIF, "RES SMD 47 OHM 5% 1/4W 1206", Device Package="1206 (3216 Metric)", Manufacturer="Vishay Dale", Operating Temperature="-55°C ~ 155°C", Power (Watts)="0.25W, 1/4W", Ratings=AEC-Q200, Supplier Device Package=1206, Supplier Part Number 1=541-47ARCT-ND, Temperature Coefficient=±200ppm/°C, Tolerance=±5%, ComponentLink1Description=Datasheet, ComponentLink1URL=http://www.vishay.com/docs/20024/dcrcwife3.pdf, ComponentLink2Description="DigiKey Link", ComponentLink2URL=http://digikey.com/product-detail/en/vishay-dale/CRCW120647R0JNEAIF/541-47ARCT-ND/3477236, Composition="Thick Film", Features="Automotive AEC-Q200, Pulse Withstanding", Height - Seated (Max)="0.024\" (0.60mm)", LastUpdated="2.9.2020 01:12:26", Lifecycle Status=Active, Minimum Order=1, Number of Terminations=2, Package / Case="1206 (3216 Metric)", Packaging=TapeAndReel, Part Number=CRCW120647R0JNEAIF, Part Status=Active, PartId=45398, Price=0.10, Resistance="47 Ohms", Series=CRCW-IF, Size / Dimension="0.126\" L x 0.063\" W (3.20mm x 1.60mm)", Supplier 1=DigiKey
R6 R7 R10 R11 R13 R15: library part CRCW1206470KFKEA, "RES SMD 470K OHM 1% 1/4W 1206", Device Package="1206 (3216 Metric)", Manufacturer="Vishay Dale", Operating Temperature="-55°C ~ 155°C", Power (Watts)="0.25W, 1/4W", Ratings=AEC-Q200, Supplier Device Package=1206, Supplier Part Number 1=541-470KFCT-ND, Temperature Coefficient=±100ppm/°C, Tolerance=±1%, ComponentLink1Description=Datasheet, ComponentLink1URL=http://www.vishay.com/docs/20035/dcrcwe3.pdf, ComponentLink2Description="DigiKey Link", ComponentLink2URL=http://digikey.com/product-detail/en/vishay-dale/CRCW1206470KFKEA/541-470KFCT-ND/1182064, Composition="Thick Film", Features="Automotive AEC-Q200", Height - Seated (Max)="0.024\" (0.60mm)", LastUpdated="2.9.2020 01:12:24", Lifecycle Status=Active, Minimum Order=1, Number of Terminations=2, Package / Case="1206 (3216 Metric)", Packaging=TapeAndReel, Part Number=CRCW1206470KFKEA, Part Status=Active, PartId=45814, Price=0.01, Resistance="470 kOhms", Series=CRCW, Size / Dimension="0.126\" L x 0.063\" W (3.20mm x 1.60mm)", Supplier 1=DigiKey
R16 R17 R18 R19 R20 R21 R33: library part CR0805-FX-3302ELF, "RES SMD 33K OHM 1% 1/8W 0805", Device Package="0805 (2012 Metric)", Manufacturer="Bourns Inc.", Operating Temperature="-55°C ~ 155°C", Power (Watts)="0.125W, 1/8W", Supplier Device Package=0805, Supplier Part Number 1=CR0805-FX-3302ELFCT-ND, Temperature Coefficient=±100ppm/°C, Tolerance=±1%, ComponentLink1Description=Datasheet, ComponentLink1URL=https://www.bourns.com/docs/Product-Datasheets/CHPREZTR.pdf, ComponentLink2Description="DigiKey Link", ComponentLink2URL=http://digikey.com/product-detail/en/bourns-inc/CR0805-FX-3302ELF/CR0805-FX-3302ELFCT-ND/4247928, Composition="Thick Film", Features="Moisture Resistant", Height - Seated (Max)="0.024\" (0.60mm)", LastUpdated="2.9.2020 01:14:29", Lifecycle Status=Active, Minimum Order=1, Number of Terminations=2, Package / Case="0805 (2012 Metric)", Packaging=TapeAndReel, Part Number=CR0805-FX-3302ELF, Part Status=Active, PartId=48969, Price=0.01, Resistance="33 kOhms", Series=CR0805, Size / Dimension="0.079\" L x 0.049\" W (2.00mm x 1.25mm)", Supplier 1=DigiKey
R22 R23 R24 R34: library part RN73R2ATTD1002F25, "RES 10K OHM 1% 1/8W 0805", Device Package="0805 (2012 Metric)", Manufacturer="KOA Speer Electronics, Inc.", Operating Temperature="-55°C ~ 155°C", Power (Watts)="0.125W, 1/8W", Supplier Device Package=0805, Supplier Part Number 1=2019-RN73R2ATTD1002F25CT-ND, Temperature Coefficient=±25ppm/°C, Tolerance=±1%, ComponentLink1Description=Datasheet, ComponentLink1URL=//media.digikey.com/pdf/Data%20Sheets/KOA%20Speer/RN73R_Type_DS.pdf, ComponentLink2Description="DigiKey Link", ComponentLink2URL=http://digikey.com/product-detail/en/koa-speer-electronics-inc/RN73R2ATTD1002F25/2019-RN73R2ATTD1002F25CT-ND/11476953, Composition="Metal Film", Features="Moisture Resistant", LastUpdated="2.9.2020 01:14:23", Lifecycle Status=Active, Minimum Order=1, Number of Terminations=2, Package / Case="0805 (2012 Metric)", Packaging=TapeAndReel, Part Number=RN73R2ATTD1002F25, Part Status=Active, PartId=50100, Price=0.06, Resistance="10 kOhms", Series=RN73R, Supplier 1=DigiKey
R25: library part CRCW060320R0FKEB, "RES SMD 20 OHM 1% 1/10W 0603", Device Package="0603 (1608 Metric)", Manufacturer="Vishay Dale", Operating Temperature="-55°C ~ 155°C", Power (Watts)="0.1W, 1/10W", Ratings=AEC-Q200, Supplier Device Package=0603, Supplier Part Number 1=541-CRCW060320R0FKEBCT-ND, Temperature Coefficient=±100ppm/°C, Tolerance=±1%, ComponentLink1Description=Datasheet, ComponentLink1URL=http://www.vishay.com/docs/20035/dcrcwe3.pdf, ComponentLink2Description="DigiKey Link", ComponentLink2URL=http://digikey.com/product-detail/en/vishay-dale/CRCW060320R0FKEB/541-CRCW060320R0FKEBCT-ND/11500739, Composition="Thick Film", Features="Automotive AEC-Q200", LastUpdated="2.9.2020 01:09:23", Lifecycle Status=Active, Minimum Order=1, Number of Terminations=2, Package / Case="0603 (1608 Metric)", Packaging=Unknown, Part Number=CRCW060320R0FKEB, PartId=56605, Price=0.10, Resistance="20 Ohms", Series=CRCW, Supplier 1=DigiKey
R26: library part KTR03EZPJ105, "RES SMD 1M OHM 5% 1/10W 0603", Device Package="0603 (1608 Metric)", Manufacturer="Rohm Semiconductor", Operating Temperature="-55°C ~ 155°C", Power (Watts)="0.1W, 1/10W", Ratings=AEC-Q200, Supplier Device Package=0603, Supplier Part Number 1=RHM1.0MAZCT-ND, Temperature Coefficient=±200ppm/°C, Tolerance=±5%, ComponentLink1Description=Datasheet, ComponentLink1URL=https://www.rohm.com/datasheet/KTR03EZPF/ktr-e, ComponentLink2Description="DigiKey Link", ComponentLink2URL=http://digikey.com/product-detail/en/rohm-semiconductor/KTR03EZPJ105/RHM1.0MAZCT-ND/2290033, Composition="Thick Film", Features="Automotive AEC-Q200, High Voltage", Height - Seated (Max)="0.022\" (0.55mm)", LastUpdated="2.9.2020 01:09:32", Lifecycle Status=Active, Minimum Order=1, Number of Terminations=2, Package / Case="0603 (1608 Metric)", Packaging=TapeAndReel, Part Number=KTR03EZPJ105, Part Status=Active, PartId=25545, Price=0.01, Resistance="1 MOhms", Series=KTR, Size / Dimension="0.063\" L x 0.031\" W (1.60mm x 0.80mm)", Supplier 1=DigiKey
R27: library part CR0603-JW-104ELF, "RES SMD 100K OHM 5% 1/10W 0603", Device Package="0603 (1608 Metric)", Manufacturer="Bourns Inc.", Operating Temperature="-55°C ~ 155°C", Power (Watts)="0.1W, 1/10W", Supplier Device Package=0603, Supplier Part Number 1=CR0603-JW-104ELFCT-ND, Temperature Coefficient=±200ppm/°C, Tolerance=±5%, ComponentLink1Description=Datasheet, ComponentLink1URL=https://www.bourns.com/docs/Product-Datasheets/CHPREZTR.pdf, ComponentLink2Description="DigiKey Link", ComponentLink2URL=http://digikey.com/product-detail/en/bourns-inc/CR0603-JW-104ELF/CR0603-JW-104ELFCT-ND/3767631, Composition="Thick Film", Features="Moisture Resistant", Height - Seated (Max)="0.022\" (0.55mm)", LastUpdated="2.9.2020 01:09:31", Lifecycle Status=Active, Minimum Order=1, Number of Terminations=2, Package / Case="0603 (1608 Metric)", Packaging=CutTape, Part Number=CR0603-JW-104ELF, Part Status=Active, PartId=25661, Price=0.10, Resistance="100 kOhms", Series=CR0603, Size / Dimension="0.063\" L x 0.031\" W (1.60mm x 0.80mm)", Supplier 1=DigiKey
R28: library part RN73R2ATTD5102B25, "RES 51K OHM 0.1% 1/8W 0805", Device Package="0805 (2012 Metric)", Manufacturer="KOA Speer Electronics, Inc.", Operating Temperature="-55°C ~ 155°C", Power (Watts)="0.125W, 1/8W", Supplier Device Package=0805, Supplier Part Number 1=2019-RN73R2ATTD5102B25CT-ND, Temperature Coefficient=±25ppm/°C, Tolerance=±0.1%, ComponentLink1Description=Datasheet, ComponentLink1URL=//media.digikey.com/pdf/Data%20Sheets/KOA%20Speer/RN73R_Type_DS.pdf, ComponentLink2Description="DigiKey Link", ComponentLink2URL=http://digikey.com/product-detail/en/koa-speer-electronics-inc/RN73R2ATTD5102B25/2019-RN73R2ATTD5102B25CT-ND/9992012, Composition="Metal Film", Features="Moisture Resistant", Height - Seated (Max)="0.024\" (0.60mm)", LastUpdated="2.9.2020 01:14:33", Lifecycle Status=Active, Minimum Order=1, Number of Terminations=2, Package / Case="0805 (2012 Metric)", Packaging=TapeAndReel, Part Number=RN73R2ATTD5102B25, Part Status=Active, PartId=48095, Price=0.07, Resistance="51 kOhms", Series=RN73R, Size / Dimension="0.079\" L x 0.049\" W (2.00mm x 1.25mm)", Supplier 1=DigiKey
R29: library part ERJ-6ENF4122V, "RES SMD 41.2K OHM 1% 1/8W 0805", Device Package="0805 (2012 Metric)", Manufacturer="Panasonic Electronic Components", Operating Temperature="-55°C ~ 155°C", Power (Watts)="0.125W, 1/8W", Ratings=AEC-Q200, Supplier Device Package=0805, Supplier Part Number 1=P41.2KCCT-ND, Temperature Coefficient=±100ppm/°C, Tolerance=±1%, ComponentLink1Description=Datasheet, ComponentLink1URL=https://industrial.panasonic.com/cdbs/www-data/pdf/RDA0000/AOA0000C304.pdf, ComponentLink2Description="DigiKey Link", ComponentLink2URL=http://digikey.com/product-detail/en/panasonic-electronic-components/ERJ-6ENF4122V/P41.2KCCT-ND/119439, Composition="Thick Film", Features="Automotive AEC-Q200", Height - Seated (Max)="0.028\" (0.70mm)", LastUpdated="2.9.2020 01:14:35", Lifecycle Status=Active, Minimum Order=1, Number of Terminations=2, Package / Case="0805 (2012 Metric)", Packaging=TapeAndReel, Part Number=ERJ-6ENF4122V, Part Status=Active, PartId=47885, Price=0.01, Resistance="41.2 kOhms", Series=ERJ, Size / Dimension="0.079\" L x 0.049\" W (2.00mm x 1.25mm)", Supplier 1=DigiKey
R30: library part ERA-6AEB7681V, "RES 7.68K OHM 0.1% 1/8W 0805", Device Package="0805 (2012 Metric)", Manufacturer="Panasonic Electronic Components", Operating Temperature="-55°C ~ 155°C", Power (Watts)="0.125W, 1/8W", Ratings=AEC-Q200, Supplier Device Package=0805, Supplier Part Number 1=P7.68KDACT-ND, Temperature Coefficient=±25ppm/°C, Tolerance=±0.1%, ComponentLink1Description=Datasheet, ComponentLink1URL=https://industrial.panasonic.com/cdbs/www-data/pdf/RDM0000/AOA0000C307.pdf, ComponentLink2Description="DigiKey Link", ComponentLink2URL=http://digikey.com/product-detail/en/panasonic-electronic-components/ERA-6AEB7681V/P7.68KDACT-ND/3075246, Composition="Thin Film", Features="Automotive AEC-Q200", Height - Seated (Max)="0.024\" (0.60mm)", LastUpdated="2.9.2020 01:14:29", Lifecycle Status=Active, Minimum Order=1, Number of Terminations=2, Package / Case="0805 (2012 Metric)", Packaging=TapeAndReel, Part Number=ERA-6AEB7681V, Part Status=Active, PartId=48833, Price=0.04, Resistance="7.68 kOhms", Series=ERA-6A, Size / Dimension="0.079\" L x 0.049\" W (2.00mm x 1.25mm)", Supplier 1=DigiKey
R32: library part CRT0805-BY-1002EST, "RESTHINFILM 0805 10K0 0.1% 125MW", Device Package="0805 (2012 Metric)", Manufacturer="Bourns Inc.", Operating Temperature="-55°C ~ 155°C", Power (Watts)="0.125W, 1/8W", Supplier Device Package=0805, Supplier Part Number 1=CRT0805-BY-1002ESTCT-ND, Temperature Coefficient=±25ppm/°C, Tolerance=±0.1%, ComponentLink1Description=Datasheet, ComponentLink1URL=https://www.bourns.com/docs/Product-Datasheets/CRT-ST.pdf, ComponentLink2Description="DigiKey Link", ComponentLink2URL=http://digikey.com/product-detail/en/bourns-inc/CRT0805-BY-1002EST/CRT0805-BY-1002ESTCT-ND/7928093, Composition="Thin Film", Features="Current Sense", Height - Seated (Max)="0.024\" (0.60mm)", LastUpdated="2.9.2020 01:14:26", Lifecycle Status=Active, Minimum Order=1, Number of Terminations=2, Package / Case="0805 (2012 Metric)", Packaging=TapeAndReel, Part Number=CRT0805-BY-1002EST, Part Status=Active, PartId=49388, Price=0.04, Resistance="10 kOhms", Series=CRT-ST, Size / Dimension="0.079\" L x 0.049\" W (2.00mm x 1.25mm)", Supplier 1=DigiKey
S1: "SWITCH TACTILE SPST-NO 0.05A 24V", Contact Rating @ Voltage="0.05A @ 24VDC", Manufacturer="TE Connectivity ALCOSWITCH Switches", Operating Force=180gf, Operating Temperature="-35°C ~ 85°C", Supplier Part Number 1=450-1140-ND, Actuator Height off PCB, Vertical=4.57mm, Actuator Orientation="Top Actuated", Actuator Type=Standard, Circuit=SPST-NO, ComponentLink1Description=Datasheet, ComponentLink1URL=https://www.te.com/commerce/DocumentDelivery/DDEController?Action=srchrtrv&DocNm=1437566-3&DocType=Customer+Drawing&DocLang=English, ComponentLink2Description="DigiKey Link", ComponentLink2URL=http://digikey.com/product-detail/en/te-connectivity-alcoswitch-switches/FSMSM/450-1140-ND/525812, LastUpdated="2.9.2020 01:27:08", Lifecycle Status=Active, Minimum Order=1, Mounting Type="Surface Mount", Outline="6.00mm x 3.50mm", Packaging=Bulk, Part Number=FSMSM, Part Status=Active, Price=0.27, Series=FSMSM, Supplier 1=DigiKey, Switch Function=Off-Mom, Termination Style="Gull Wing", Illumination=Non-Illuminated
U1: "8-bit AVR Microcontroller, 32KB Flash, 1KB EEPROM, 2KB SRAM, 32-pin MLF, Industrial Grade (-40°C to 85°C)", Code_JEDEC=MO-220-VHHD-2, DatasheetVersion="revA, Jan-2010", PackageDescription="32-Pin Micro Lead Frame Package (MLF),  5 x 5 x 1.0 mm Body, Pitch 0.50 mm, 3.10mm Exposed Pad", PackageReference=32M1-A, PackageVersion="revE, May-2006", PartNumber=ATMEGA328P-MU
Y1: library part NX2520SA-16MHZ-EXS00A-CS11340, "CRYSTAL 16MHZ 8PF SMD", ESR (Equivalent Series Resistance)="80 Ohms", Frequency Stability=±15ppm, Load Capacitance=8pF, Manufacturer="NDK America, Inc.", Operating Mode=Fundamental, Operating Temperature="-10°C ~ 70°C", Package / Case="4-SMD, No Lead", Supplier Part Number 1=644-1327-1-ND, ComponentLink1Description=Datasheet, ComponentLink1URL=//media.digikey.com/pdf/Data%20Sheets/NDK%20PDFs/NX2520SA-16MHz-EXS00A-CS11340.pdf, ComponentLink2Description="DigiKey Link", ComponentLink2URL=http://digikey.com/product-detail/en/ndk-america-inc/NX2520SA-16MHZ-EXS00A-CS11340/644-1327-1-ND/8275445, Frequency=16MHz, Frequency Tolerance=±15ppm, Height - Seated (Max)="0.022\" (0.55mm)", LastUpdated="2.9.2020 01:21:57", Lifecycle Status=Active, Minimum Order=1, Mounting Type="Surface Mount", Packaging=TapeAndReel, Part Number=NX2520SA-16MHZ-EXS00A-CS11340, Part Status=Active, PartId=525, Price=0.73, Series=NX2520SA, Size / Dimension="0.098\" L x 0.079\" W (2.50mm x 2.00mm)", Supplier 1=DigiKey, Type="MHz Crystal"

## Free pads (board coordinates)
  rrect50% 5x4 smd: 4(33.528,51.308) 4(33.528,60.452)
  rrect50% 5x4 smd far side: 4(33.528,51.308) 4(33.528,60.452)
  rrect50% 9x3.5 smd: 5(45.085,70.612) 5(60.071,70.612) 5(74.93,70.612)
  rrect50% 9x3.5 smd far side: 6(45.085,70.612) 6(60.071,70.612) 6(74.93,70.612)

## Via types
v1: diameter 0.518, hole 0.254, Top Layer to Bottom Layer, 206 vias
v2: diameter 1, hole 0.6, Top Layer to Bottom Layer, 48 vias
v3: diameter 0.518, hole 0.254, Top Layer to Bottom Layer, tented both sides, 20 vias
v4: diameter 0.6, hole 0.3, Top Layer to Bottom Layer, 9 vias
v5: diameter 0.5, hole 0.2, Top Layer to Bottom Layer, 9 vias
v6: diameter 0.6, hole 0.3, Top Layer to Bottom Layer, tented both sides, 5 vias

## Nets (pads, with @x,y where several pads share a name; then routed paths per layer and width w, separated by ;. In a path a pad name is that pad's centre, name@x,y a point inside that pad or via, vN(x,y) a via of type N, cw(c..) or ccw(c..) an arc to the next point about the centre after c; other vN are vias at no path point)
BEMF1: C5.1 IC1.6 pad.5@45.085,70.612 pad.6@45.085,70.612 Q2.1 Q2.2 Q2.3 Q4.5 Q4.6 Q4.7 Q4.8 R7.1 R17.2 | length 29.8
  Top Layer w0.381: v1(46.95,46.85) 46.976,46.876 46.976,48.03 IC1.6@47.03,48.084
  Top Layer w0.4: v1(44.9,65.625) R7.1@45.725,65.625
  Top Layer w0.5: v1(46.25,53.85) 46.25,51 C5.1@46.55,50.7 46.95,50.3 46.95,49.639 47.03,49.559 IC1.6@47.03,48.084
  Bottom Layer w0.381: R17.2@41.475,38.15 41.475,41.375 v1(46.95,46.85)
  Bottom Layer w0.4: 41.9,60.95 43.85,59 43.85,56.6 43.525,56.275 43.525,54.139 43.814,53.85 v1(46.25,53.85)
  Bottom Layer w0.5: 41.875,60.95 41.9,60.95
  other v1: 38.65,62.55 39.405,62.55 40.16,62.55 40.915,62.55 41.67,62.55 42.425,62.55 44.025,63.25 44.685,63.25 45.345,63.25 46.005,63.25 46.665,63.25 47.325,63.25 38.65,63.3 39.4,63.3 40.15,63.3 40.9,63.3 41.65,63.3 42.4,63.3
  other v2: 41.656,69.85 43.078,69.85 44.501,69.85 45.923,69.85 47.346,69.85 48.768,69.85 41.656,71.374 43.078,71.374 44.501,71.374 45.923,71.374 47.346,71.374 48.768,71.374
BEMF2: C11.1 IC2.6 pad.5@60.071,70.612 pad.6@60.071,70.612 Q5.1 Q5.2 Q5.3 Q6.5 Q6.6 Q6.7 Q6.8 R13.1 R19.2 | length 28.7
  Top Layer w0.381: v1(62.625,46.825) 62.644,46.844 62.644,48.065 IC2.6@62.663,48.084
  Top Layer w0.4: v1(60.775,65.75) R13.1@61.625,65.75
  Top Layer w0.6: v1(61.904,53.779) 62,53.683 C11.1@62,50.7 62,50.65 62.663,49.987 IC2.6@62.663,48.084
  Bottom Layer w0.381: R19.2@57.15,38.125 57.15,41.35 v1(62.625,46.825)
  Bottom Layer w0.4: 58.225,60 59.475,58.75 59.475,56.741 59.05,56.316 59.05,54.184 59.456,53.779 61.861,53.779 61.883,53.8 v1(61.904,53.779)
  other v1: 54.525,62.625 55.28,62.625 56.035,62.625 56.79,62.625 57.545,62.625 58.3,62.625 59.8,63.325 60.46,63.325 61.12,63.325 61.78,63.325 62.44,63.325 63.1,63.325 54.525,63.375 55.275,63.375 56.025,63.375 56.775,63.375 57.525,63.375 58.275,63.375
  other v2: 56.642,69.85 58.064,69.85 59.487,69.85 60.909,69.85 62.332,69.85 63.754,69.85 56.642,71.374 58.064,71.374 59.487,71.374 60.909,71.374 62.332,71.374 63.754,71.374
BEMF3: C20.1 IC3.6 pad.5@74.93,70.612 pad.6@74.93,70.612 Q1.1 Q1.2 Q1.3 Q3.5 Q3.6 Q3.7 Q3.8 R6.1 R21.2 | length 30
  Top Layer w0.381: v1(77.939,46.814) 77.939,46.851 77.996,46.909 77.996,48.062 IC3.6@78.018,48.084
  Top Layer w0.4: v1(75.325,65.725) R6.1@76.3,65.725
  Top Layer w0.6: v1(77.118,53.888) 77.375,53.631 C20.1@77.375,50.7 77.375,50.65 78.018,50.007 IC3.6@78.018,48.084
  Bottom Layer w0.381: R21.2@72.025,38.2 72.025,41 77.839,46.814 v1(77.939,46.814)
  Bottom Layer w0.4: 72.8,60.525 74.5,58.825 74.5,56.441 74.147,56.088 74.147,54.034 74.381,53.8 76.998,53.8 77.086,53.888 v1(77.118,53.888)
  Bottom Layer w0.6: v1@77.105,53.875 v1(77.118,53.888)
  other v1: 69.4,62.7 70.155,62.7 70.91,62.7 71.665,62.7 72.42,62.7 73.175,62.7 74.675,63.4 75.335,63.4 75.995,63.4 76.655,63.4 77.315,63.4 77.975,63.4 69.4,63.45 70.15,63.45 70.9,63.45 71.65,63.45 72.4,63.45 73.15,63.45
  other v2: 71.501,69.85 72.923,69.85 74.346,69.85 75.768,69.85 77.191,69.85 78.613,69.85 71.501,71.374 72.923,71.374 74.346,71.374 75.768,71.374 77.191,71.374 78.613,71.374
BEMF_Out1: R20.2 R21.1 R22.2 U1.25 | length 47.4
  Top Layer w0.254: v1(56.416,19.968) 56.467,20.018 56.467,20.266 56.762,20.561 56.762,20.564 U1.25@56.517,20.808 ; v1(65.225,27.625) 65.225,34.3 65.711,34.786 v1(65.75,34.786)
  Top Layer w0.381: R20.2@50.225,32.525 55.9,32.525 59.825,36.45 v3(68.55,36.45)
  Bottom Layer w0.254: v1(56.416,19.968) 61.343,19.968 65.225,23.85 v1(65.225,27.625) ; v1(65.75,34.786) 66.886,34.786 v3(68.55,36.45)
  Bottom Layer w0.381: v3(68.55,36.45) R22.2@69.825,36.45
BEMF_Out2: R18.2 R19.1 R23.2 U1.24 | length 45.8
  Top Layer w0.254: v1(40.85,30) 40.85,22.245 45.82,17.275 v1(45.9,17.275) ; v1(44.517,34.583) 45.804,34.583 47.863,32.525 R18.2@47.962,32.525 ; v1(54.85,18.75) 54.85,19.2 55.207,19.557 55.207,20.383 U1.24@55.633,20.808
  Top Layer w0.381: R18.2@47.962,32.525 48.062,32.525 51.912,36.375 v3(53.8,36.375)
  Bottom Layer w0.254: v1(40.85,30) 40.85,30.917 v1(44.517,34.583) ; v1(45.9,17.275) 53.38,17.275 54.85,18.745 v1(54.85,18.75)
  Bottom Layer w0.381: v3(53.8,36.375) R23.2@55,36.375
BEMF_Out3: R16.2 R17.1 R24.2 U1.23 | length 38.4
  Top Layer w0.254: v1(41.675,30) 41.675,22.325 v1(45.9,18.1) ; v1(45.1,33.943) 45.7,33.343 R16.2@45.7,32.525 ; v1(54.025,18.825) 54.025,19.057 54.753,19.785 54.753,20.636 U1.23@55.28,21.162
  Top Layer w0.381: v3(41.485,35.407) 44.368,32.525 R16.2@45.7,32.525
  Bottom Layer w0.254: v1(41.675,30) 41.675,30.575 45.043,33.943 v1(45.1,33.943) ; v1(45.9,18.1) 45.951,18.049 53.249,18.049 v1(54.025,18.825)
  Bottom Layer w0.381: R17.1@41.475,36.375 41.485,36.365 v3(41.485,35.407)
DTR: C2.2 J1.2 | length 2.3
  Top Layer w0.254: J1.2@50.56,15.7 50.56,17.935 C2.2@50.575,17.95
GND: C1.2 C3.1 C4.1 C6.1 C7.1 C9.1 C10.1 C12.1 C13.1 C14.1 C15.1 C16.1 C17.2 C18.1 C19.1 C21.1 C22.1 C26.1 C27.1 IC1.4 IC2.4 IC3.4 IC4.4 J1.1 J2.1 J3.1 J4.6 R22.1 R23.1 R24.1 R30.1 R34.1 S1.2 U1.3 U1.5 U1.21 U1.33 Y1.2 Y1.4 | length 32.2
  Top Layer w0.254: C10.1@42.55,24.35 42.6,24.35 44.515,26.265 J4.6@44.85,26.265 ; v1(53.696,19.633) 53.692,19.633 53.127,20.198 C7.1@53.127,20.223 53.982,21.077 53.982,21.278 U1.21@54.572,21.869 ; v3(57.03,29.355) 57.03,29.361 57.493,29.824 57.493,29.893 C3.1@57.499,29.893 ; U1.5@57.578,25.581 57.578,25.584 58.098,26.104 58.098,26.234 v3(58.149,26.285) ; U1.3@58.285,24.874 59.035,25.624 v3(59.378,25.624) ; v3(58.4,28.2) 58.448,28.2 Y1.2@58.989,28.741 ; Y1.4@61.111,28.459 61.645,28.993 v3(61.645,29) ; C4.1@61.911,26.686 v1(62.35,27.125) ; C13.1@63.177,25.202 v1(63.675,25.7) ; R34.1@68.7,32.5 v1(68.7,33.35) ; IC4.4@77.475,25.825 77.495,25.805 v1(78.099,25.805) ; C19.1@79.225,32.525 v1(80,32.525)
  Top Layer w0.381: v1(67.425,23.475) C26.1@68.175,23.475 ; R30.1@73.1,32.475 v1@73.1,33.6
  Top Layer w0.6: S1.2@39.22,21.475 S1.2@39.2,21.455 v3(40.42,21.455) ; IC1.4@48.3,42.634 48.3,42.927 C6.1@50.35,42.927 50.275,42.852 v6(50.275,41.95) ; IC2.4@63.933,42.634 63.933,42.78 66.004,42.78 66.025,42.802 C12.1@66.025,42.927 66.038,42.914 v6(66.038,41.95) ; IC3.4@79.288,42.634 79.288,42.78 81.104,42.78 C27.1@81.25,42.927 81.275,42.902 v6(81.275,41.95)
  Bottom Layer w0.254: C1.2@51.927,19.048 51.936,19.057 52.393,19.057 52.699,18.751 v1(52.728,18.751) ; C14.1@59.525,17.85 v1(60.4,17.85)
  Bottom Layer w0.381: R24.1@39.375,38.125 v3@39.375,39.15 ; R23.1@55,38.125 v3(55,39.1) ; R22.1@69.825,38.2 v3@69.825,39.2
  other v1: 62.25,15.25 63.188,15.25 64.125,15.25 65.063,15.25 66,15.25 67.725,29.3 69.225,29.3 71.375,29.3 72.75,29.3 73.1,33.55 52.212,48.65 53.2,48.65 54.188,48.65
  other v3: 39.375,39.1 69.825,39.1
  other v5: 56.075,22.169 55.297,22.947 56.853,22.947 54.519,23.725 56.075,23.725 57.631,23.725 55.297,24.503 56.853,24.503 56.075,25.281
HIN1: IC1.2 J4.4 U1.15 | length 29.7
  Top Layer w0.254: J4.4@44.85,23.725 45.093,23.968 45.568,23.968 46.646,25.046 49.972,25.046 50.536,25.61 52.422,25.61 ; v3@45.7,41.3 45.73,41.33 45.73,42.604 IC1.2@45.76,42.634 ; v1(51.775,26.257) 52.422,25.61 ; U1.15@53.512,24.52 52.422,25.61
  Bottom Layer w0.254: v3@45.7,41.3 45.74,41.26 45.74,32.292 v1(51.775,26.257)
  other v3: 45.7,41.375
HIN2: IC2.2 U1.14 | length 22
  Top Layer w0.254: v1(53.3,30.675) 53.3,30.6 52.5,29.8 52.5,26.239 U1.14@53.865,24.874 ; IC2.2@61.359,42.6 IC2.2@61.393,42.634 v3@61.393,41.4
  Bottom Layer w0.254: v1(53.3,30.675) 61.325,38.7 v3(61.325,41.4)
HIN3: IC3.2 U1.13 | length 33.8
  Top Layer w0.254: U1.13@54.219,25.228 53.042,26.404 53.042,28.817 59.651,35.426 69.966,35.426 76.748,42.209 IC3.2@76.748,42.634
LIN1: IC1.3 U1.11 | length 20.3
  Top Layer w0.254: IC1.3@47.03,42.634 47.053,42.611 47.053,41.397 v3(47.075,41.375) ; v1(53.903,27.557) 54.322,27.138 54.322,26.541 54.926,25.938 U1.11@54.926,25.935
  Bottom Layer w0.254: v3(47.075,41.375) 47.075,33.9 53.418,27.557 v1(53.903,27.557)
LIN2: IC2.3 U1.9 | length 19.2
  Top Layer w0.254: v1(55.407,27.59) 55.275,27.458 55.275,27.003 55.633,26.645 U1.9@55.633,26.642 ; v3@62.6,41.35 62.632,41.381 62.632,42.602 IC2.3@62.663,42.634
  Bottom Layer w0.254: v1(55.407,27.59) 55.407,30.874 62.6,38.066 v3@62.6,41.35
  other v3: 62.6,41.4
LIN3: IC3.3 U1.1 | length 28.5
  Top Layer w0.254: U1.1@58.992,24.167 59.7,24.875 v1(59.975,24.875) ; IC3.3@78.018,42.634 78.022,42.63 78.022,41.378 v3(78.025,41.375)
  Bottom Layer w0.254: v1(59.975,24.875) 61.35,24.875 70.765,34.29 72.752,34.29 75.942,37.48 75.942,39.292 v3(78.025,41.375)
MISO: J4.1 U1.16 | length 7.3
  Top Layer w0.254: v1(52.044,24.921) 52.404,24.921 U1.16@52.912,24.413
  Bottom Layer w0.254: J4.1@47.39,21.185 51.126,24.921 v1(52.044,24.921)